# Altium PCB SJA1105Q_LAN8870_EVB_revA.PcbDoc (part 1 of 5)
Units mm, origin at the board's own origin, x right, y up, seen from the top; angles counter-clockwise.
Board outline 128 x 110 mm, 6 copper layers (Top Layer, Mid Layer 1, Mid Layer 2, Mid Layer 3, Mid Layer 4, Bottom Layer), stack 1.538 mm thick; 490 components, 327 nets, 1659 pads, 519 vias.
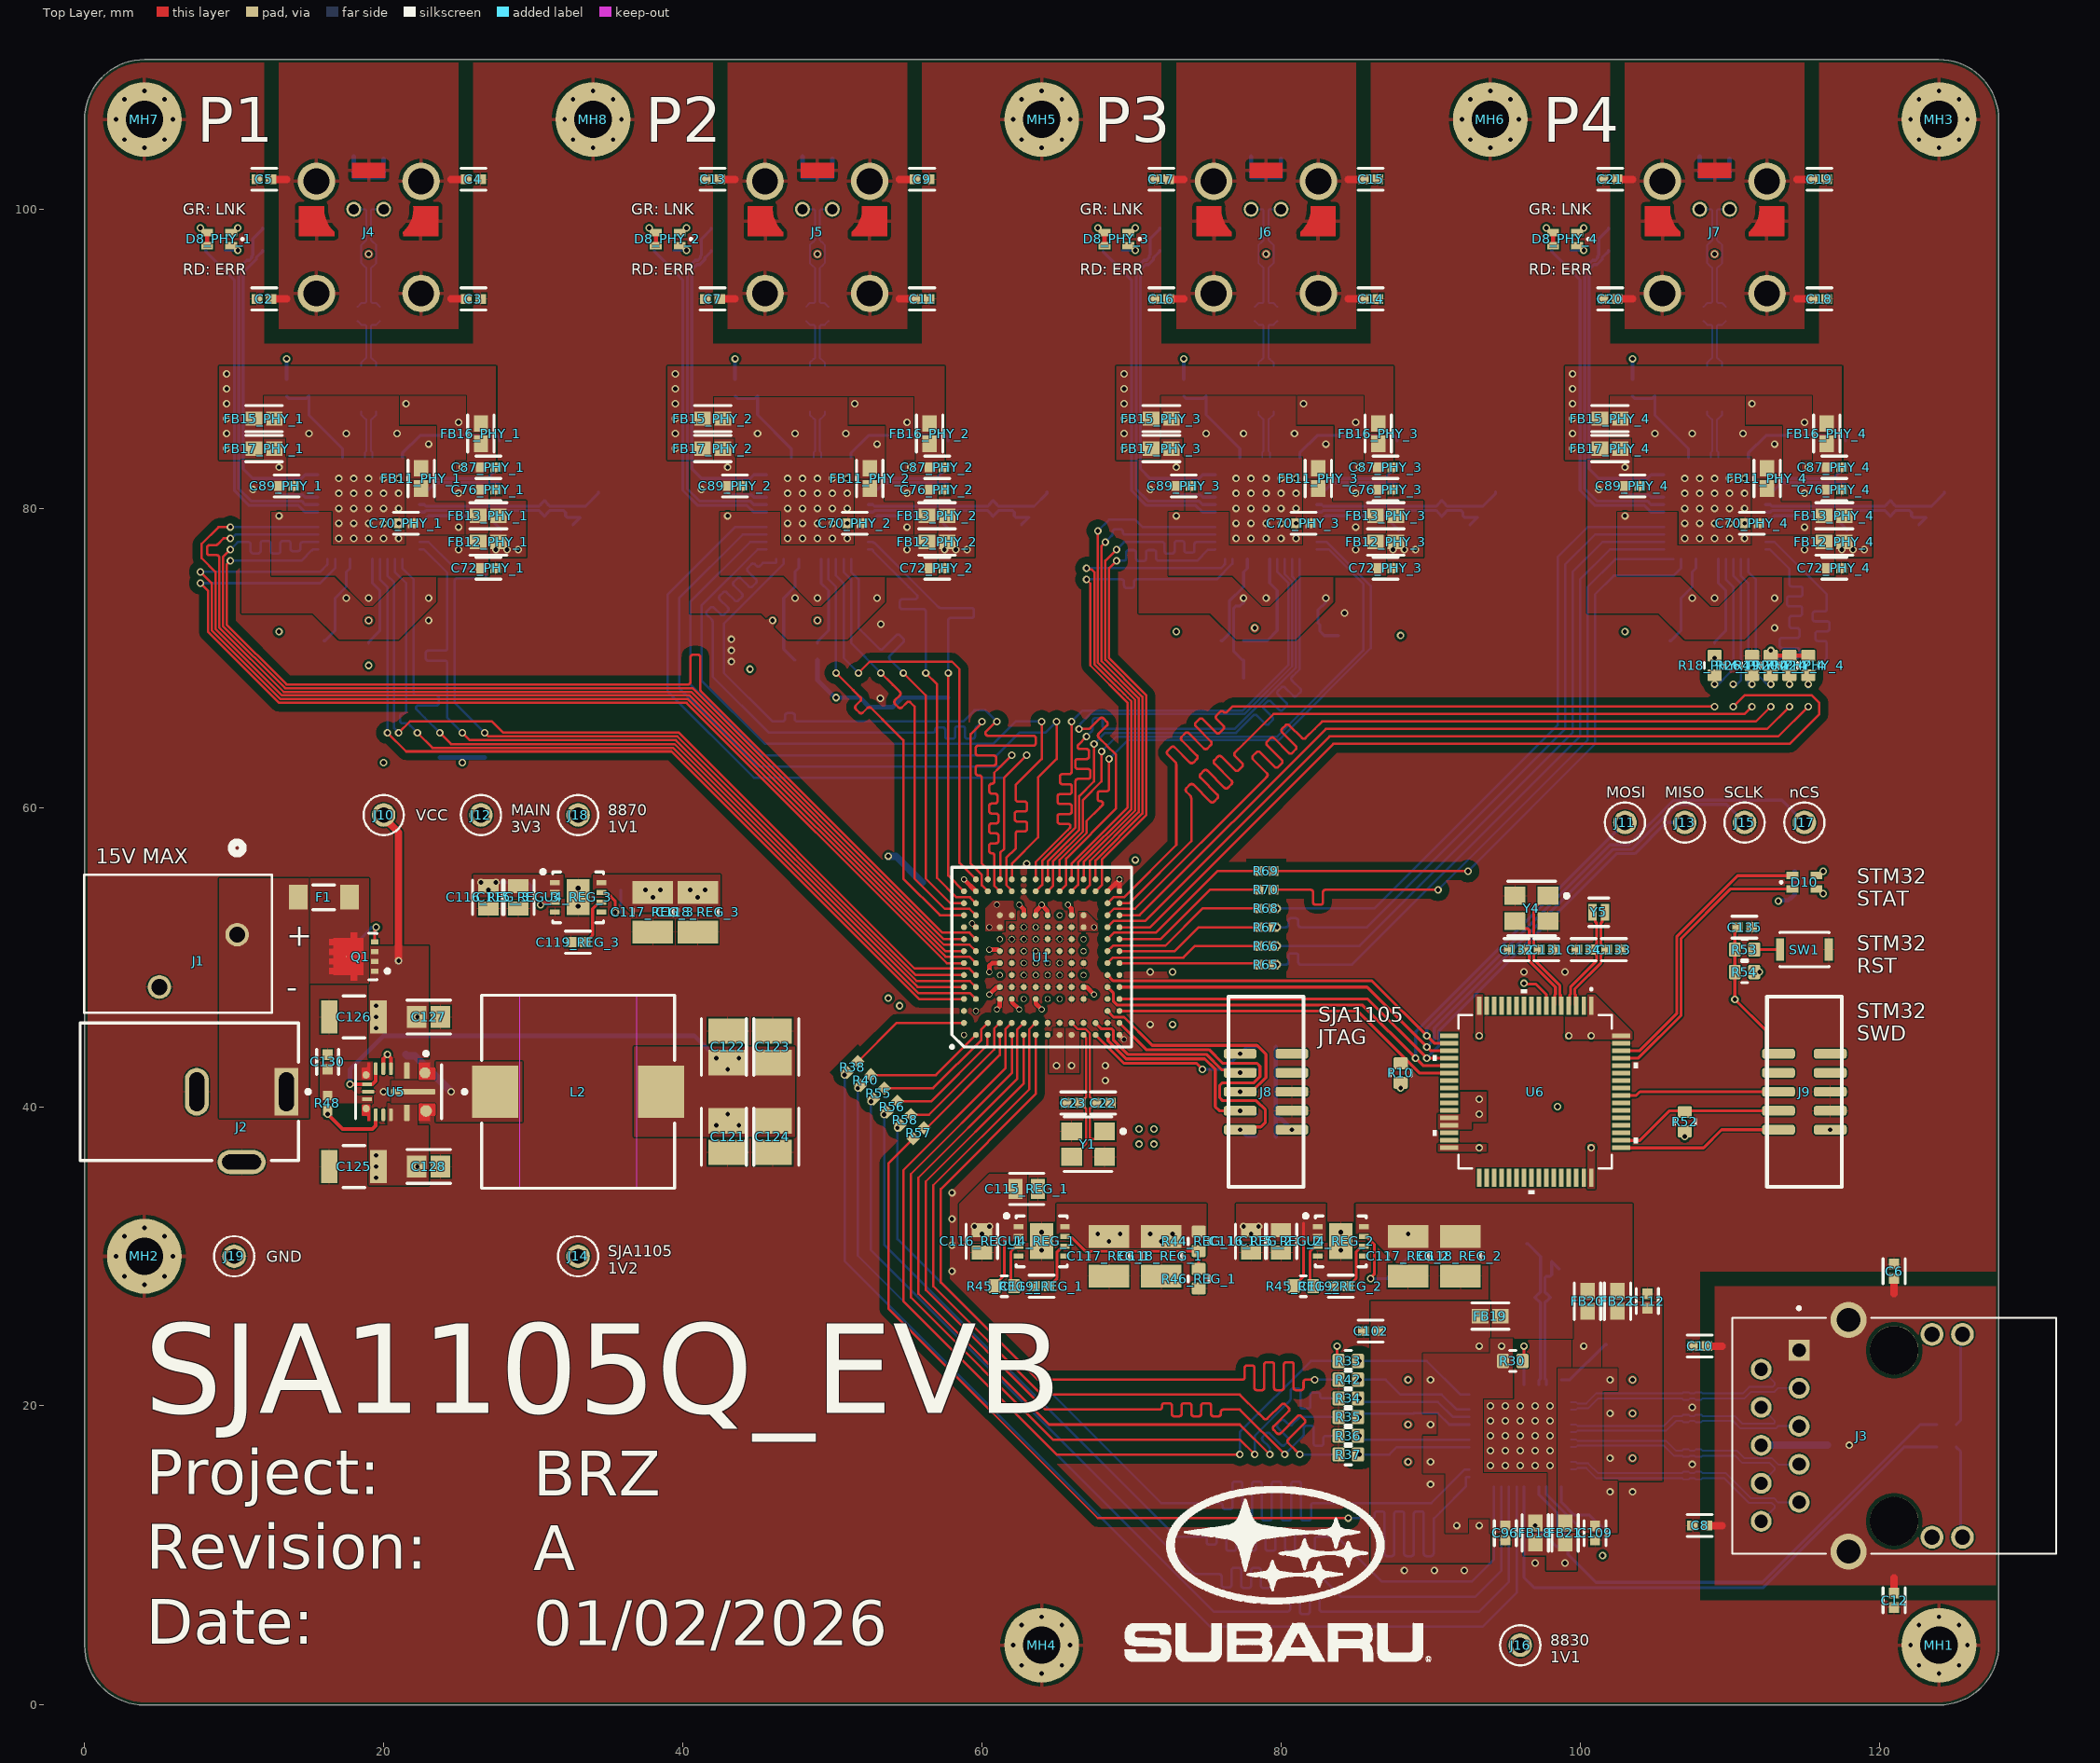
[diagram p0: Top Layer view]
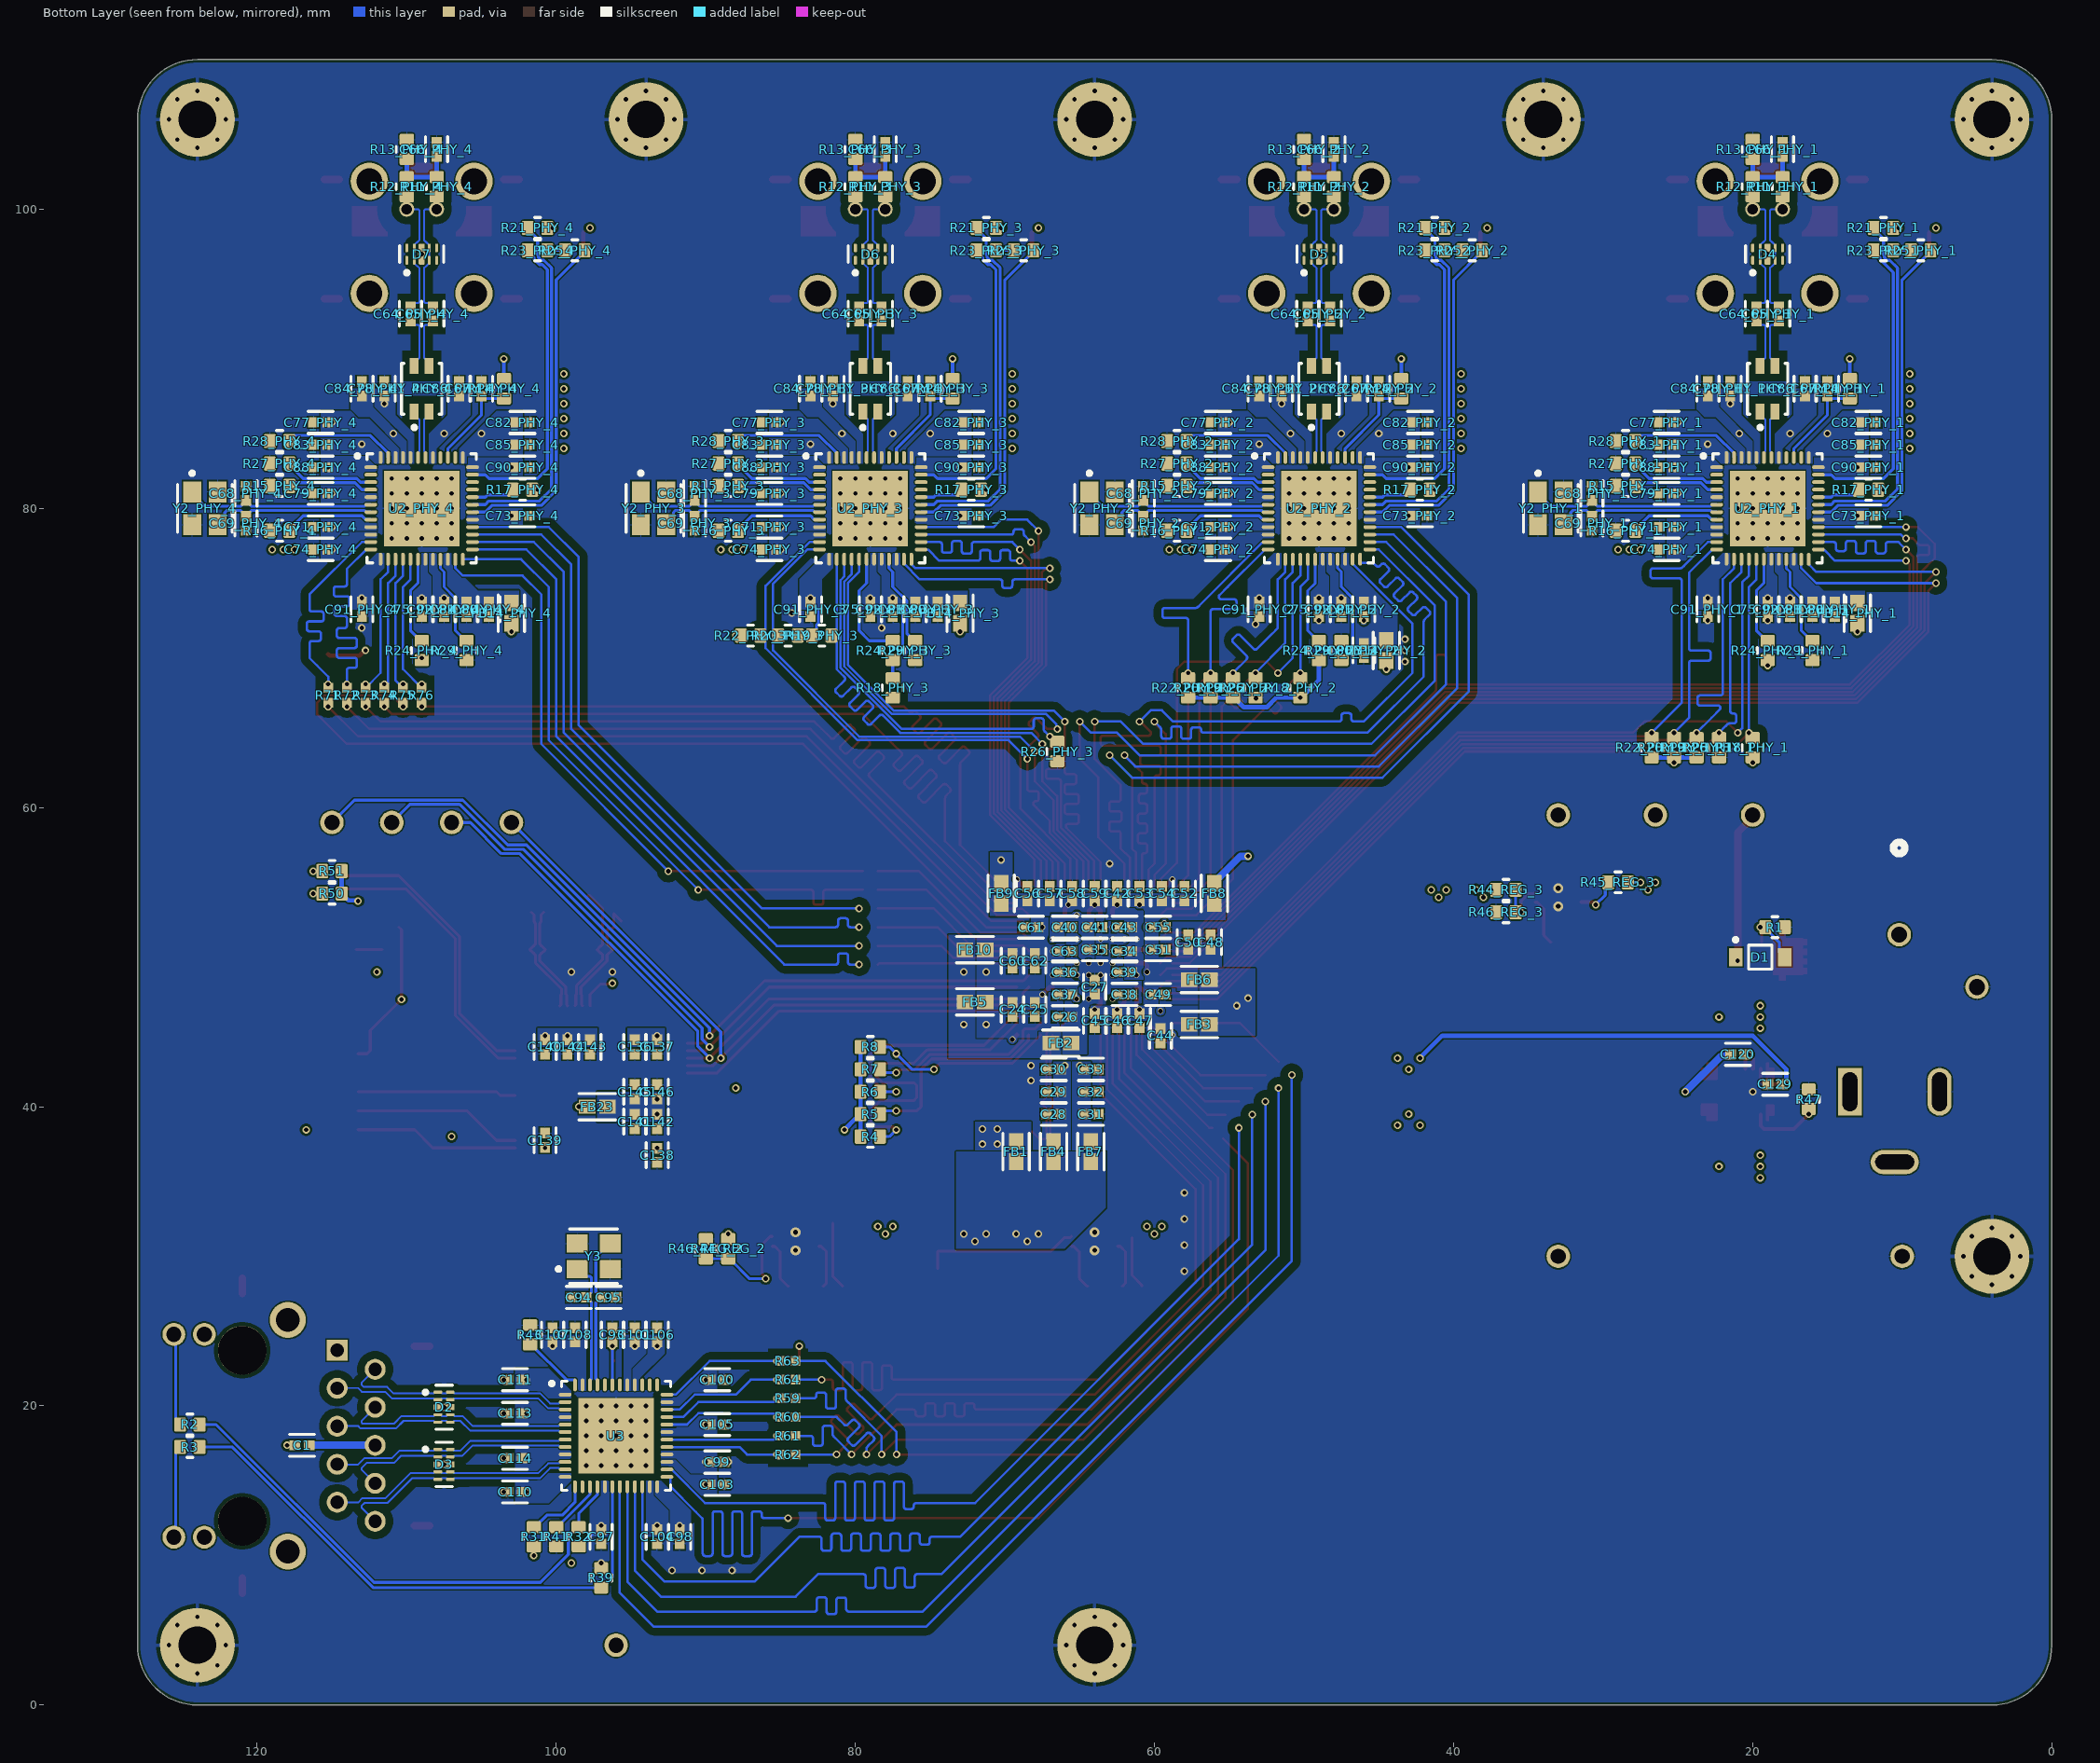
[diagram p1: Bottom Layer view, seen from below]
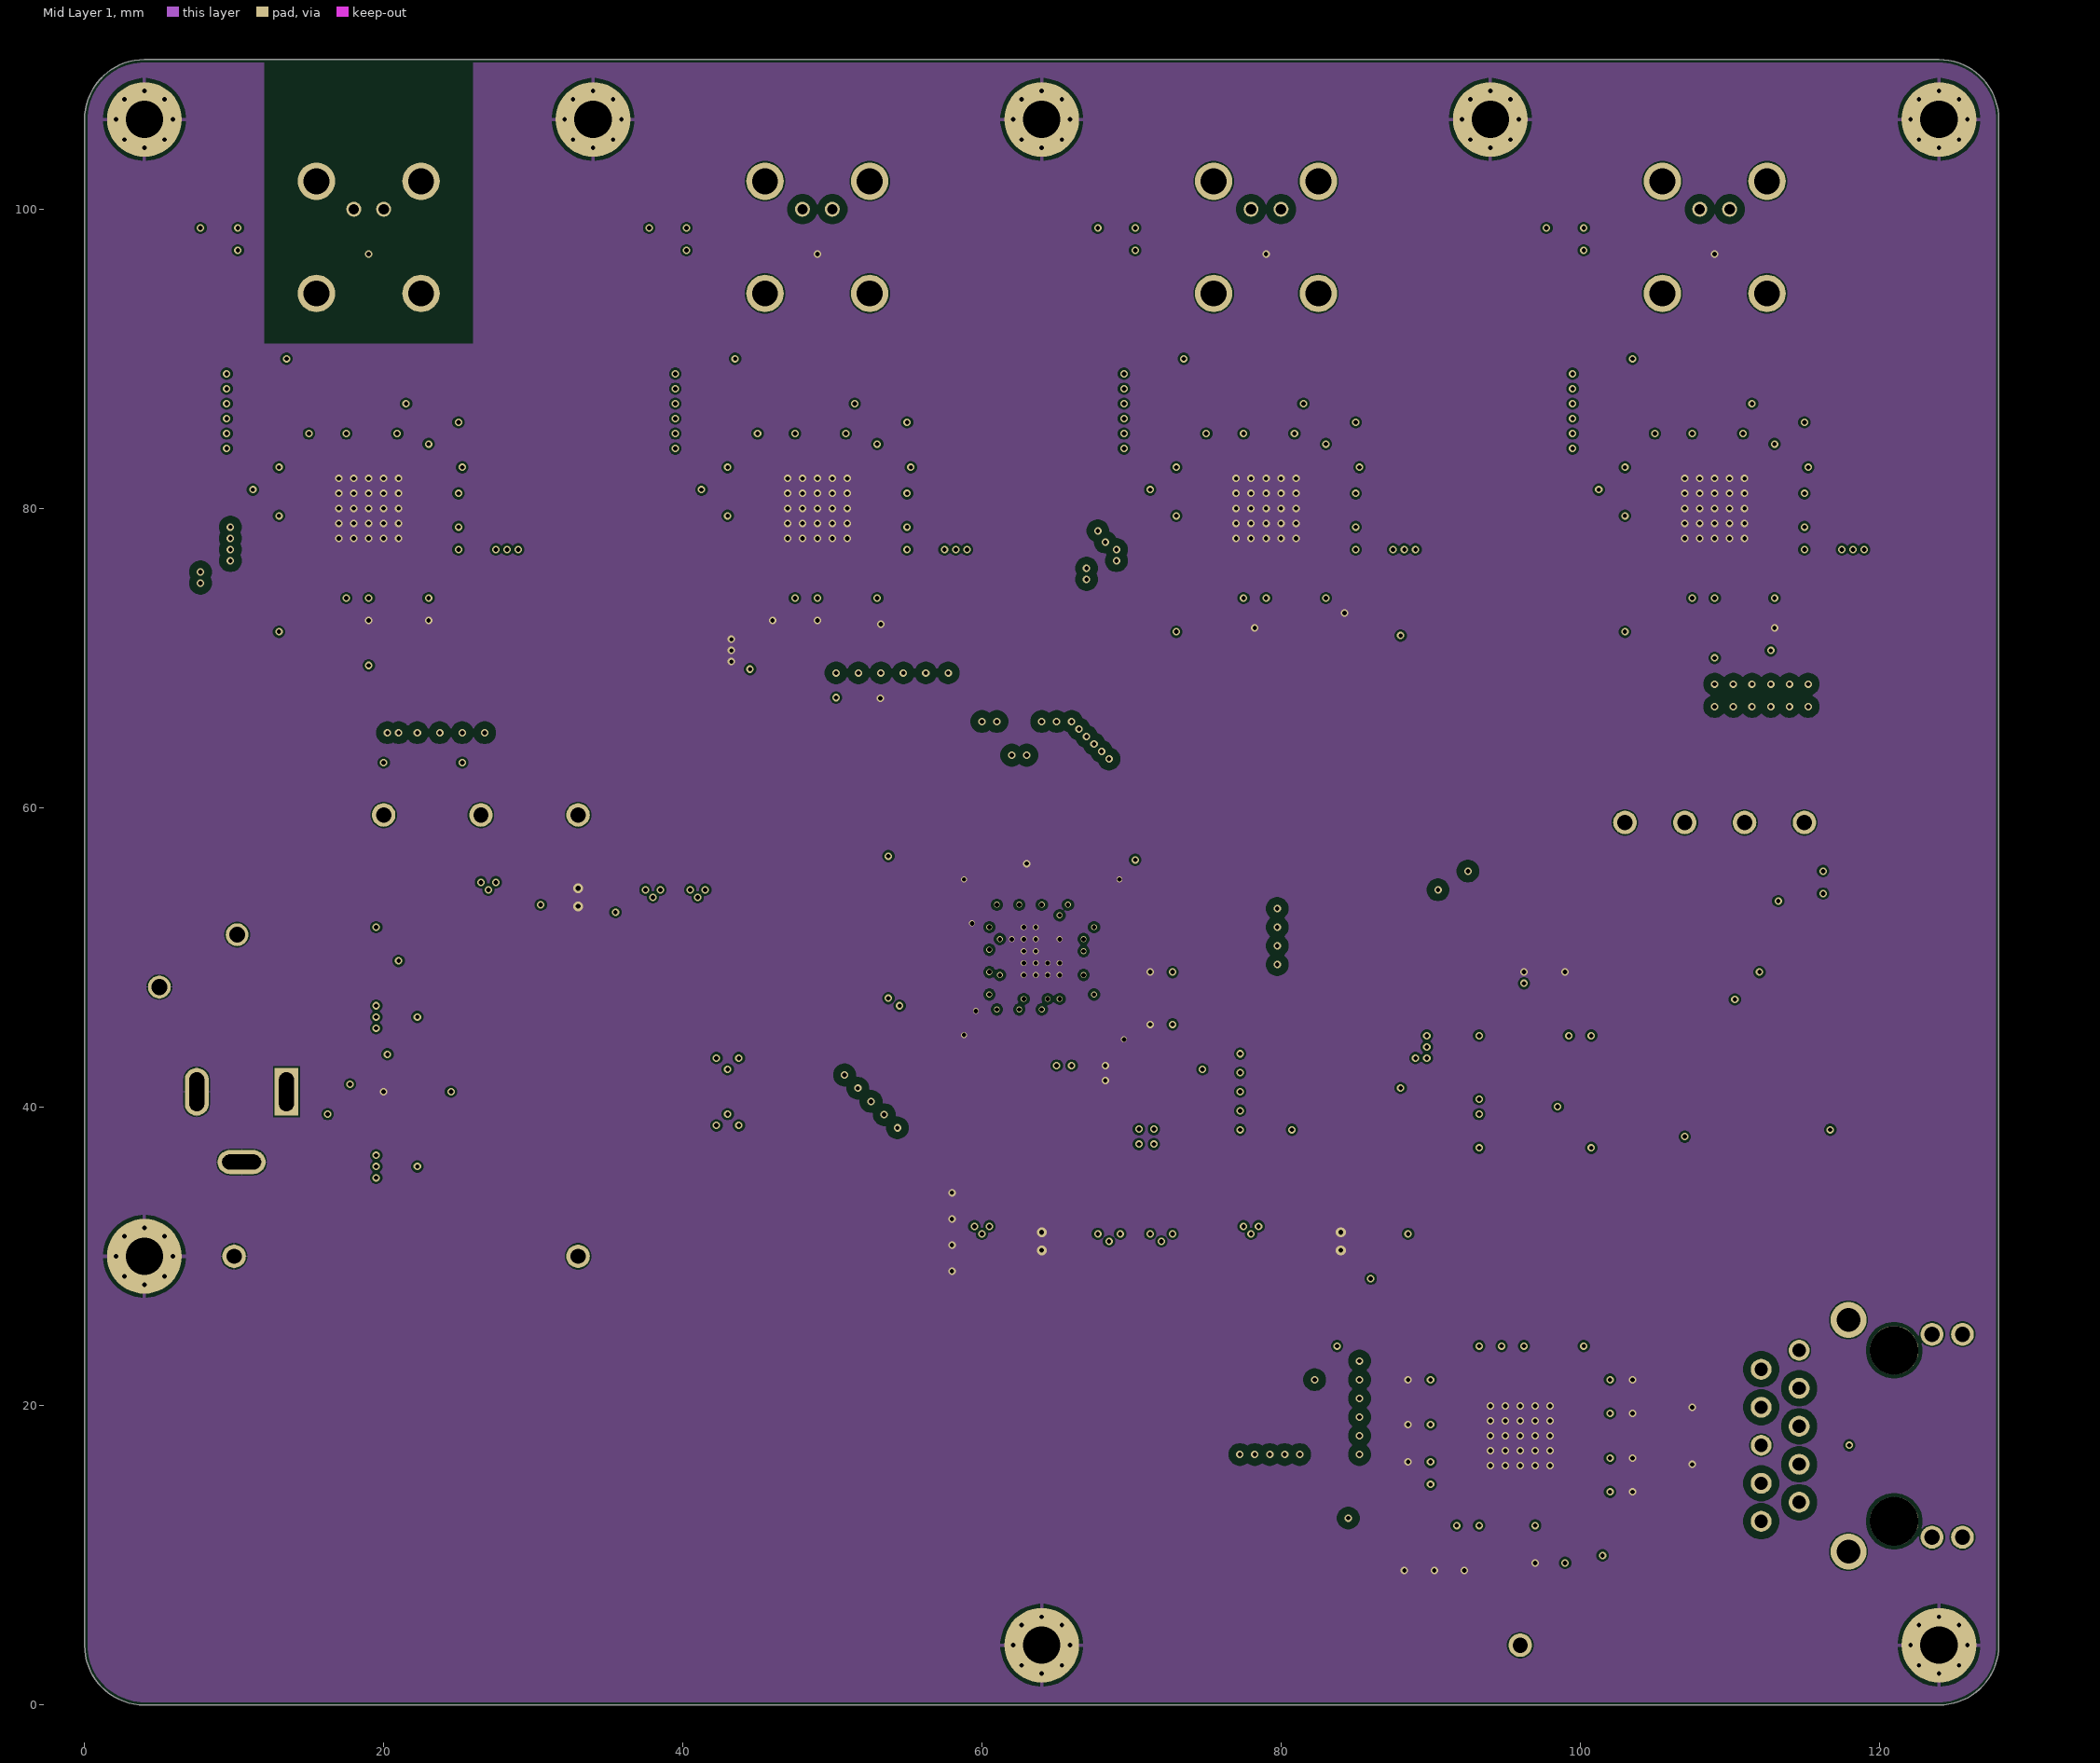
[diagram p2: Mid Layer 1]
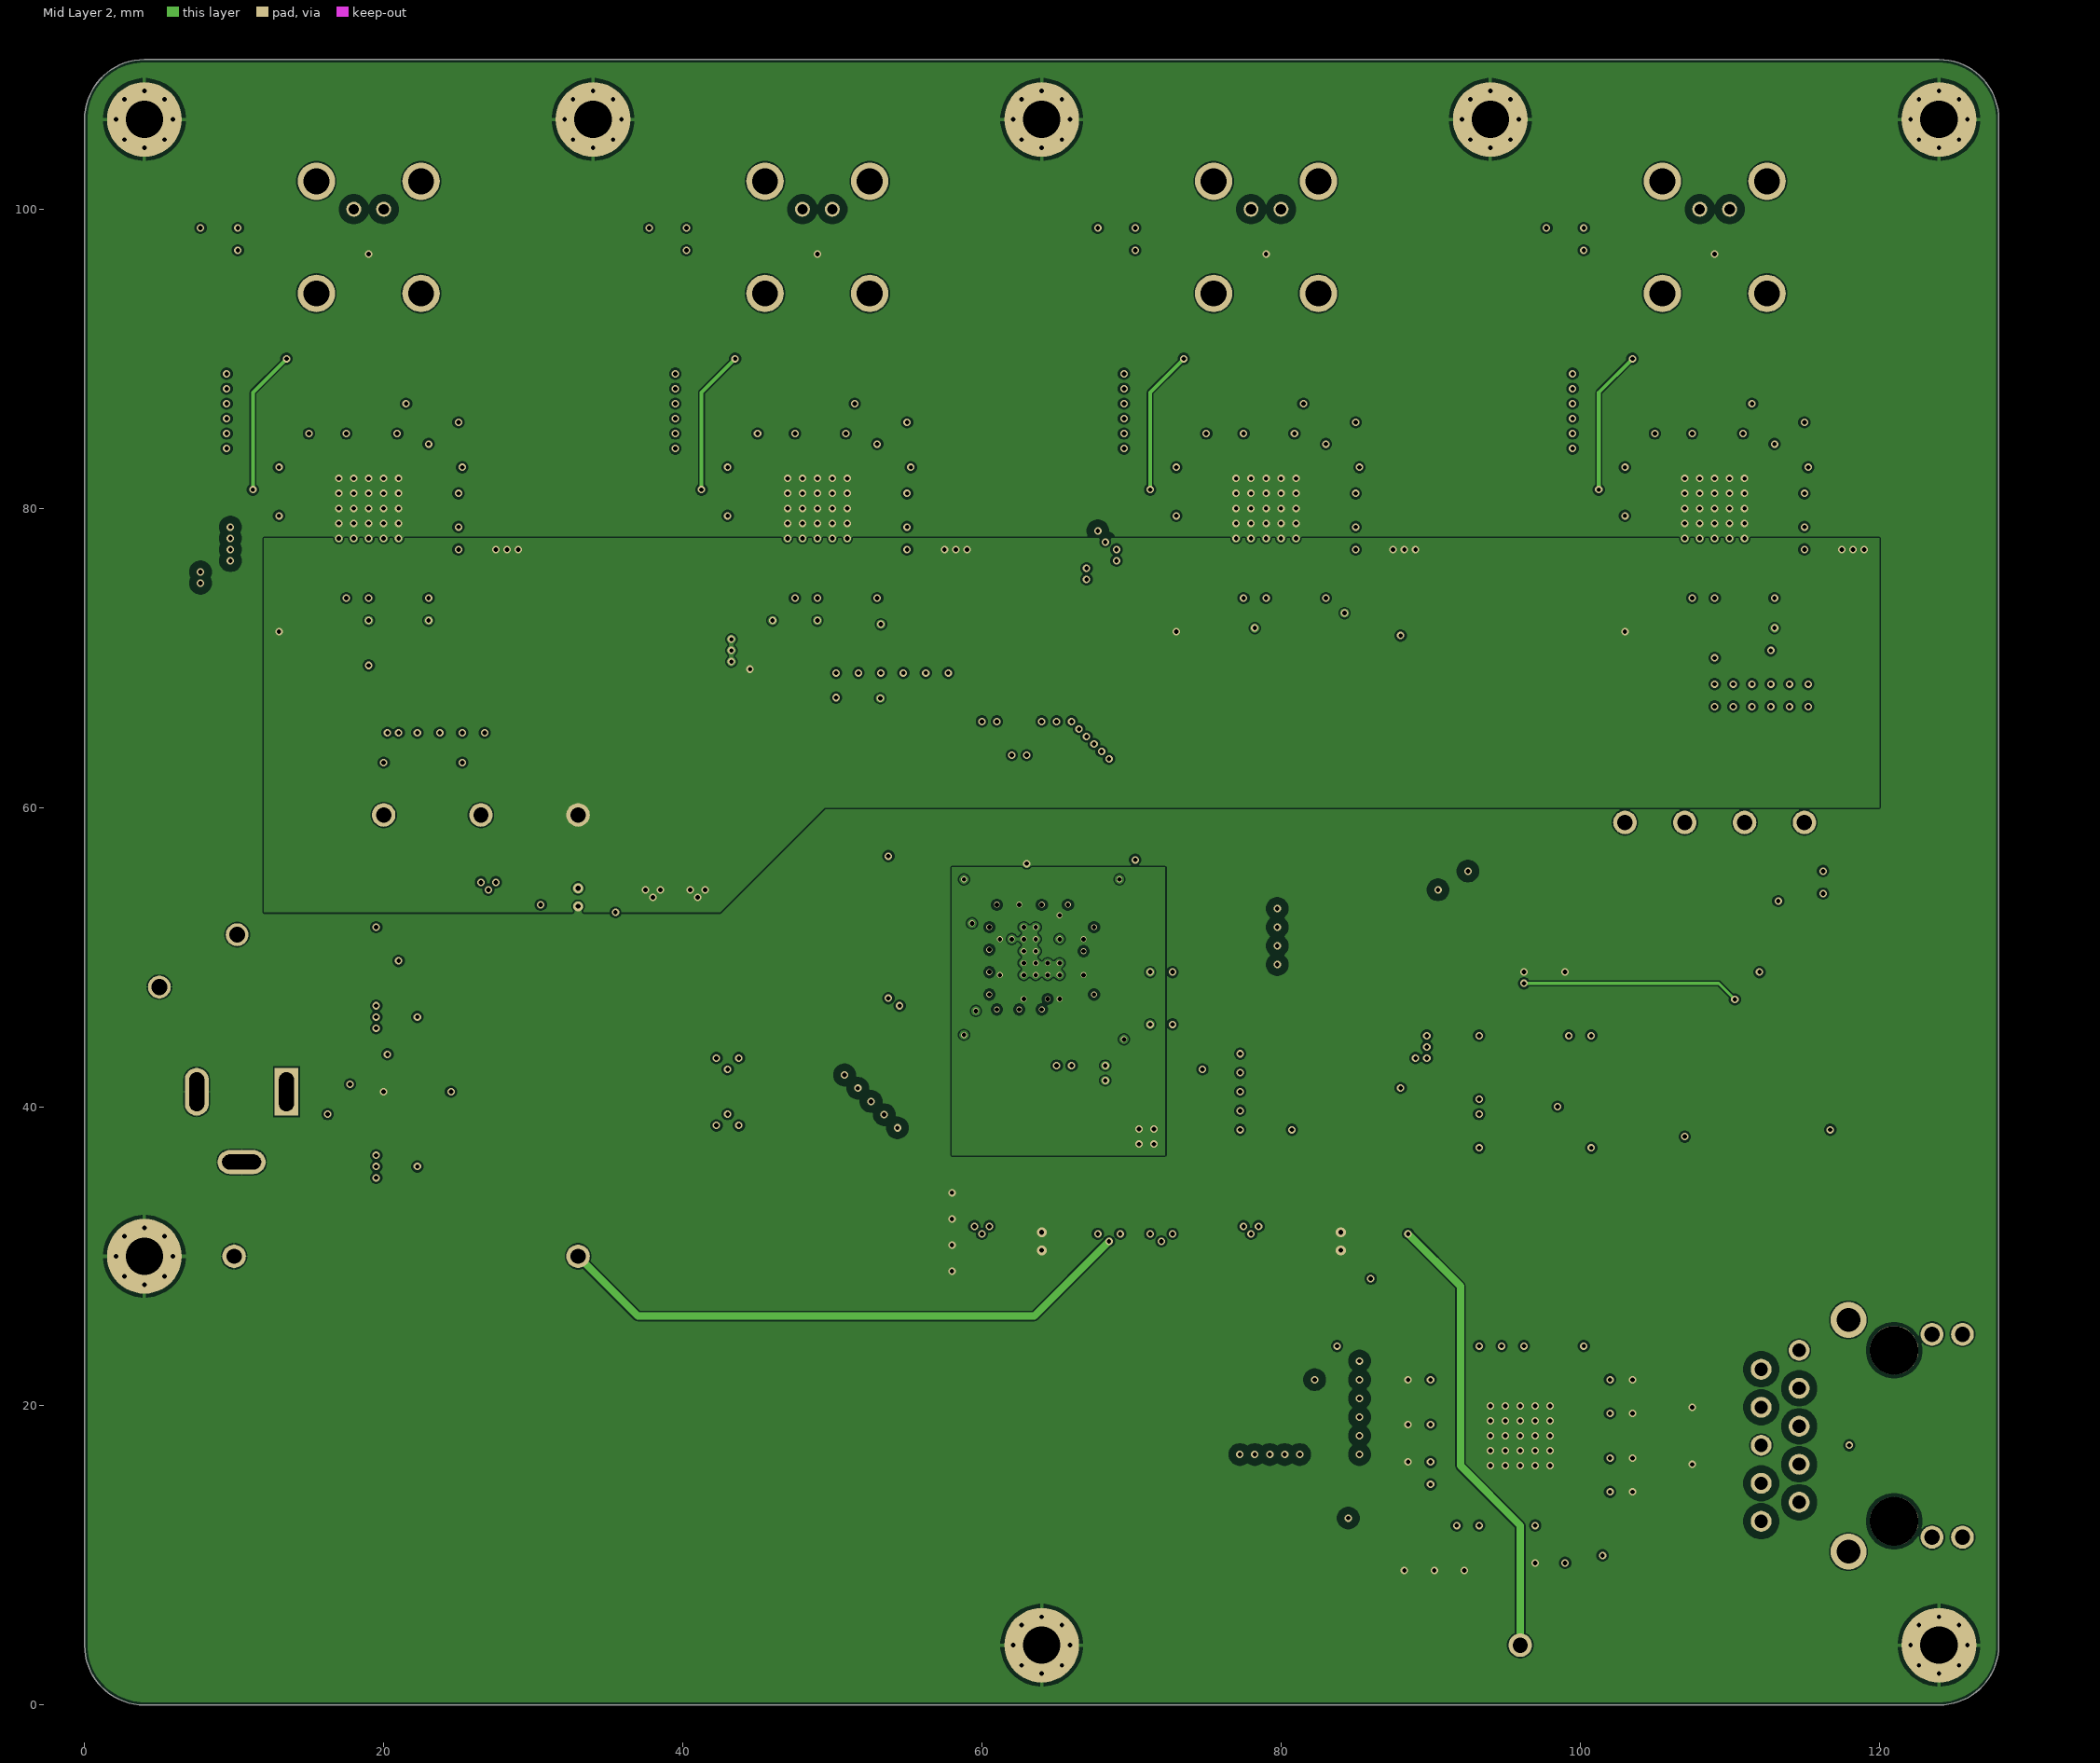
[diagram p3: Mid Layer 2]
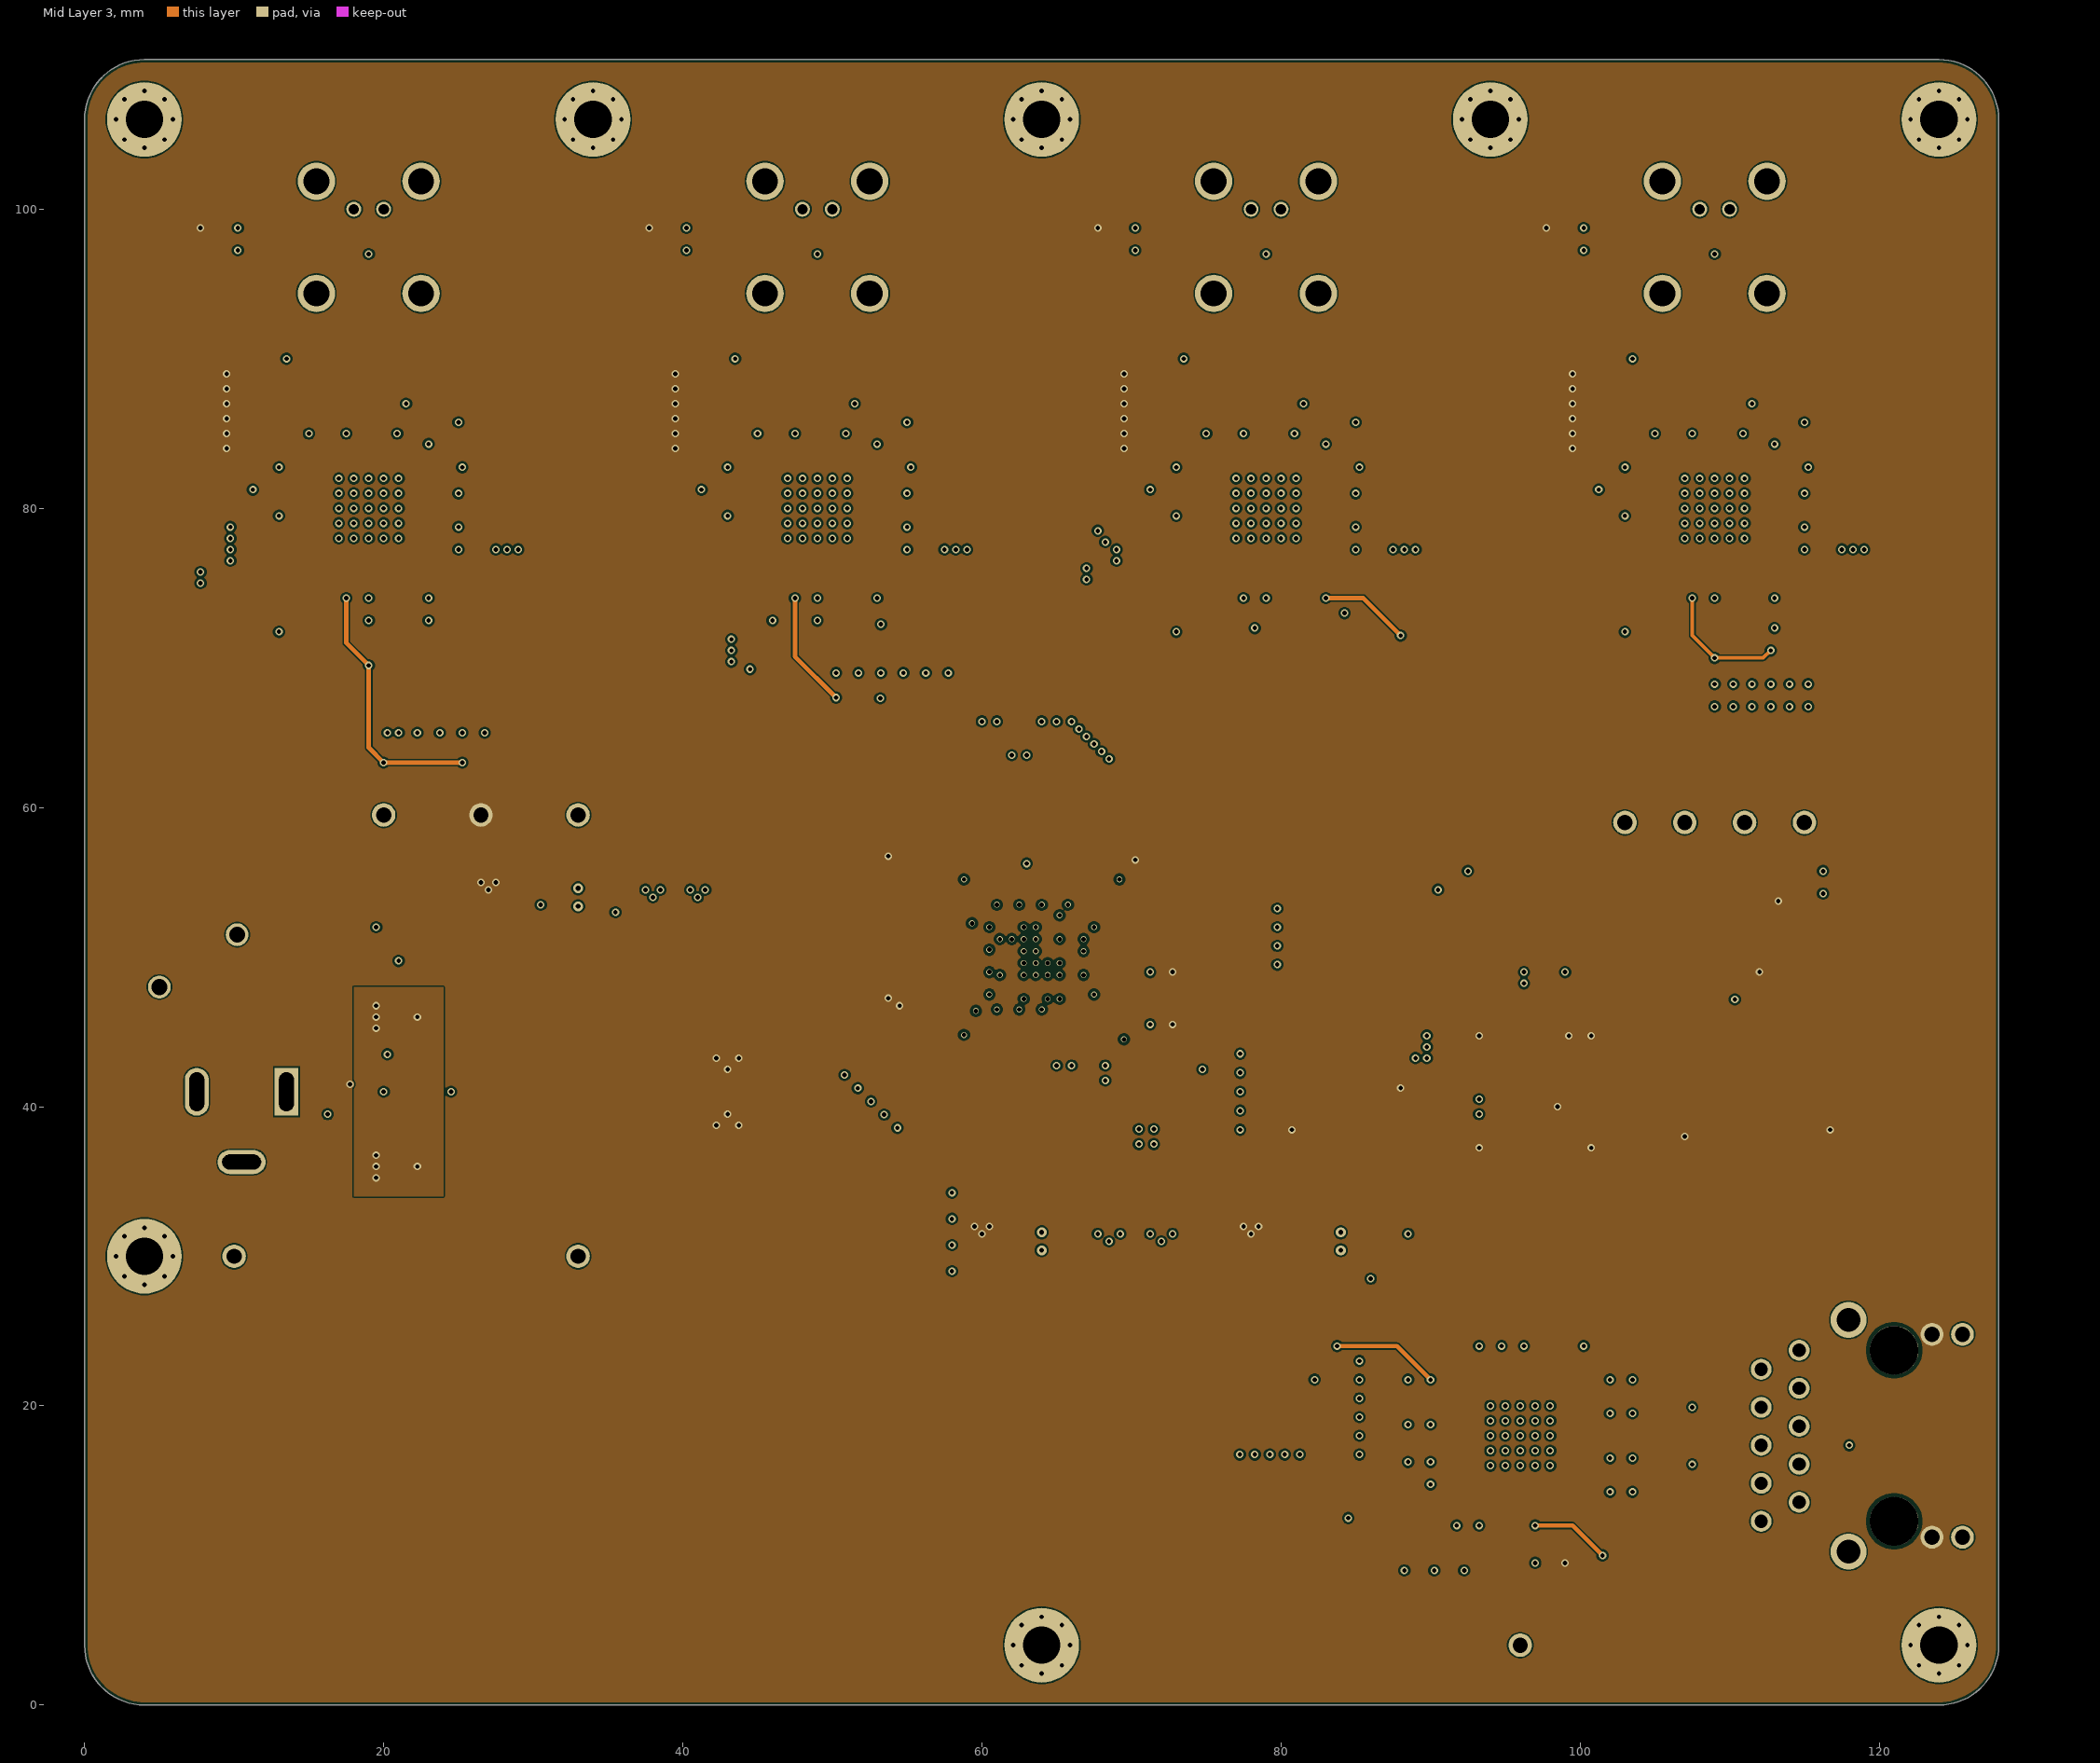
[diagram p4: Mid Layer 3]
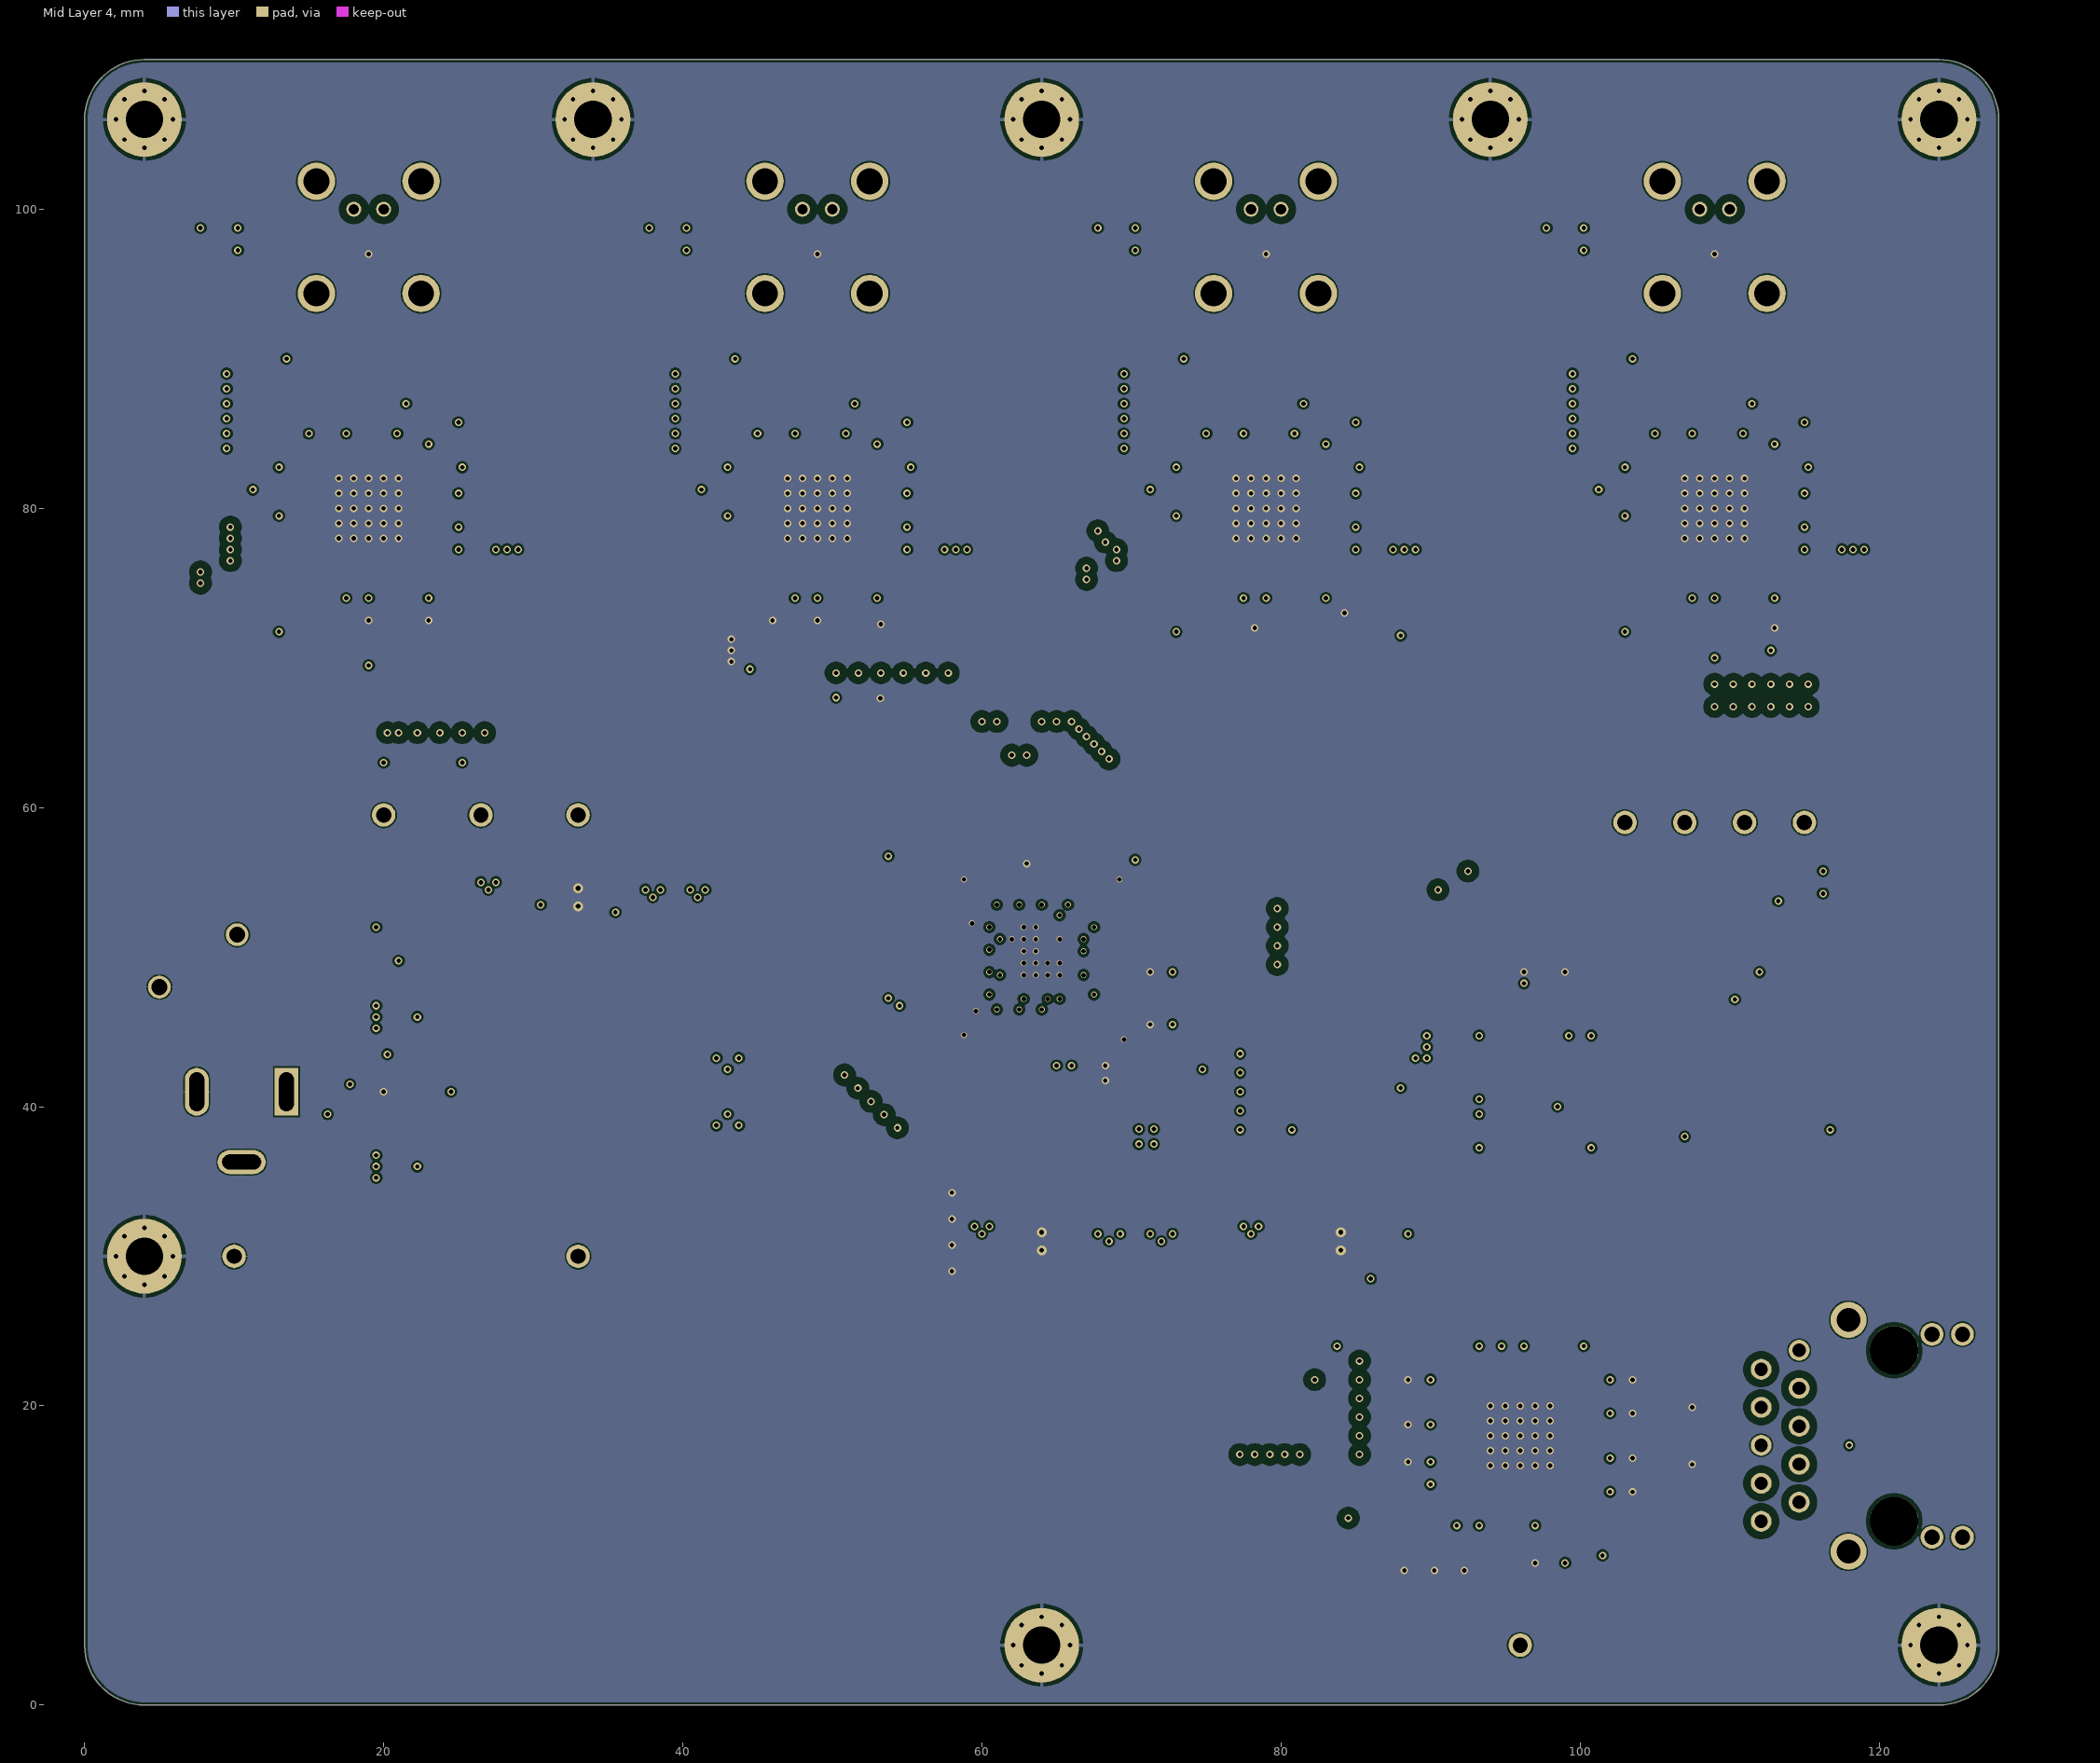
[diagram p5: Mid Layer 4]
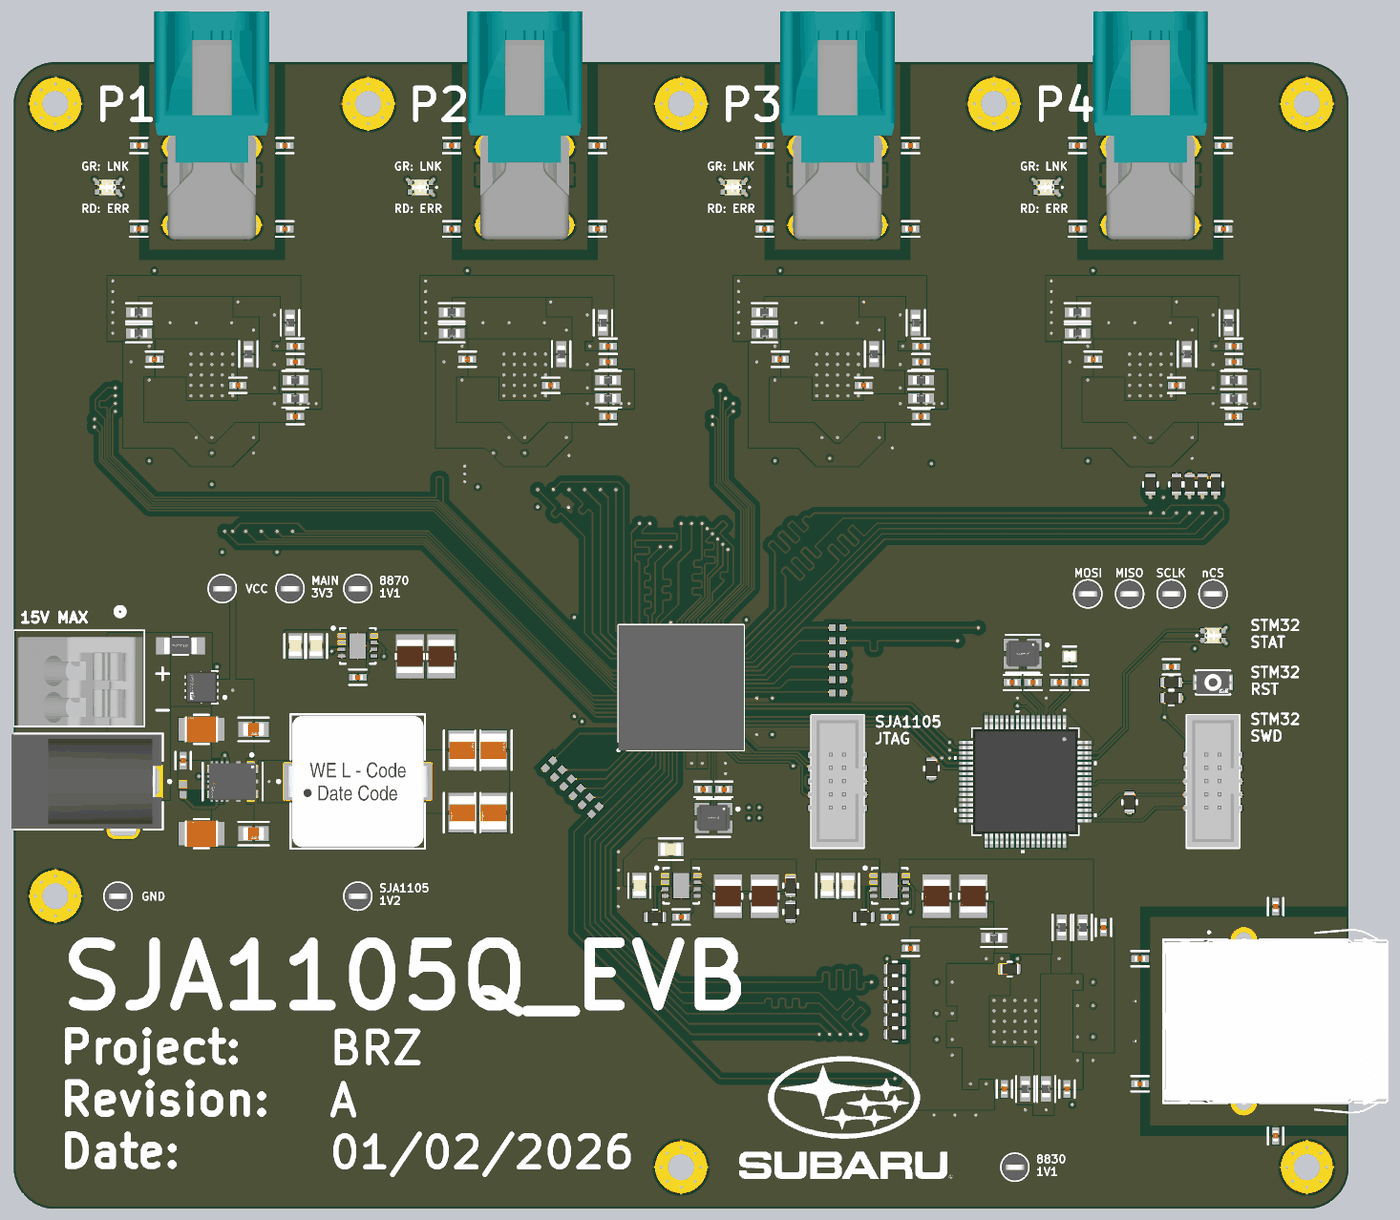
[diagram p10: 3D render of the assembled board from above, using the file's embedded part models]
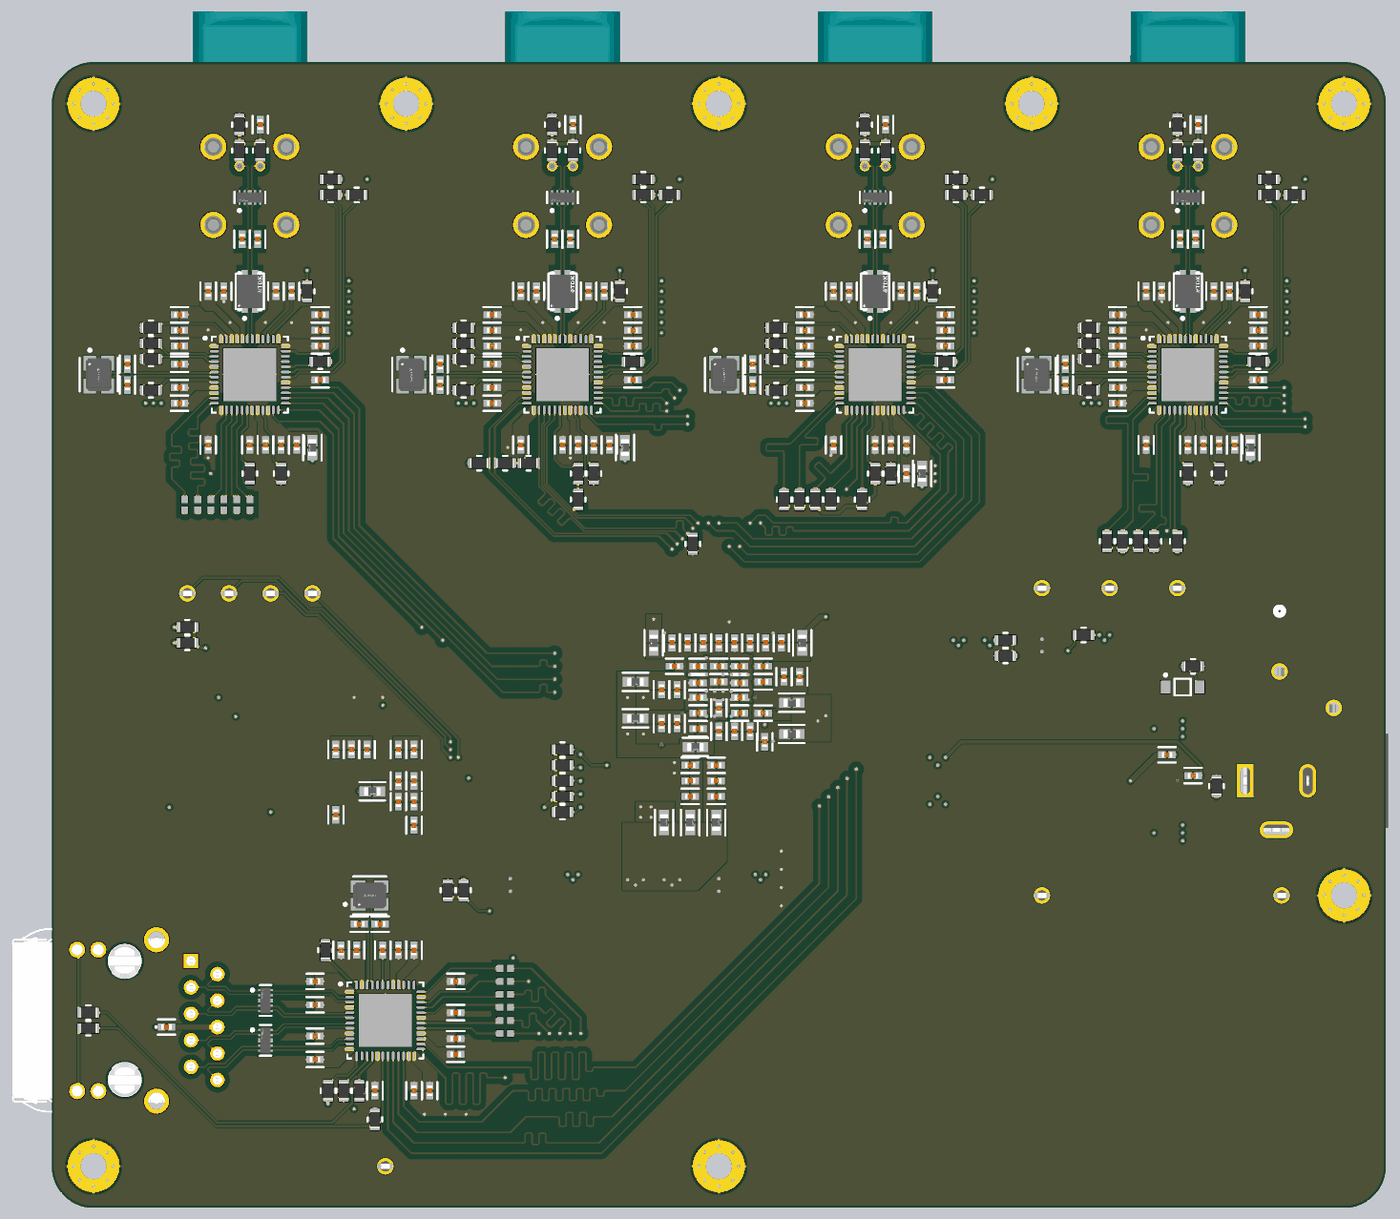
[diagram p11: 3D render of the assembled board from below, using the file's embedded part models]

## Layer stack, top to bottom
Top Solder: solder mask 0.0127, Solder Resist, Dk 3.8
Top Layer: signal copper 0.035
Dielectric 1: prepreg 0.0994, PP-015, Dk 4.3
Mid Layer 1: signal copper 0.0152
Core 1: core 0.55, FR-4, Dk 4.5
Mid Layer 2: signal copper 0.0152
Dielectric 2: prepreg 0.1088, 2116, Dk 4.25
Mid Layer 3: signal copper 0.0152
Core 2: core 0.55, FR-4, Dk 4.5
Mid Layer 4: signal copper 0.0152
Dielectric 3: prepreg 0.0994, PP-015, Dk 4.3
Bottom Layer: signal copper 0.035
Bottom Solder: solder mask 0.0127, Solder Resist, Dk 3.8

## Board outline
0,4 0,106 cw(c4,106) 4,110 124,110 cw(c124,106) 128,106 128,4 cw(c124,4) 124,0 4,0 cw(c4,4)

## Design rules (kind name [scope] priority, off if disabled: settings)
BoardOutlineClearance [All] p1: gap=0.2 ignorepadtopadclearanceinfootprint=FALSE
Clearance IMPEDANCE_CLEARANCE [InDifferentialPairClass('100DIFF') or InNetClass('P0_RXD') or InNetClass('P0_TXD') or InNetClass('P1_RXD') or InNetClass('P1_TXD') or InNetClass('P2_RXD') or InNetClass('P2_TXD') or InNetClass('P3_RXD') or InNetClass('P3_TXD') or InNetClass('P4_RXD') or InNetClass('P4_TXD') vs InNet('GND')] p1: gap=0.5 ignorepadtopadclearanceinfootprint=FALSE except(0.089: Arc-Arc Arc-Track Arc-SMDPad Arc-THPad Arc-Text Track-Track Track-SMDPad Track-THPad Track-Text SMDPad-SMDPad SMDPad-THPad SMDPad-Text THPad-THPad THPad-Text Fill-Text Poly-Text Region-Text Text-Text; 0.127: Arc-Via Track-Via SMDPad-Via THPad-Via Via-Via Via-Text; 0.25: Arc-Hole Track-Hole SMDPad-Hole THPad-Hole Via-Hole Fill-Hole Poly-Hole Region-Hole Text-Hole)
Clearance [All] p2: gap=0.089 ignorepadtopadclearanceinfootprint=FALSE except(0.127: Arc-Via Track-Via SMDPad-Via THPad-Via Via-Via Via-Fill Via-Poly Via-Region Via-Text; 0.25: Arc-Hole Track-Hole SMDPad-Hole THPad-Hole Via-Hole Fill-Hole Poly-Hole Region-Hole Text-Hole)
ComponentClearance [All] p1: gap=0.089 collisioncheckmode=3 verticalgap=0.089 showdistances=TRUE
DiffPairsRouting 100OHM [InDifferentialPairClass('100DIFF')] p1: maxlimit=0.2 minlimit=0.127 mostfreqgap=0.127 toplayer_mingap=0.2 toplayer_prefgap=0.2 toplayer_minwidth=0.123 toplayer_maxwidth=0.123 toplayer_prefwidth=0.123 midlayer1_maxgap=0.127 midlayer1_minwidth=0.074 midlayer1_maxwidth=0.074 midlayer1_prefwidth=0.074 midlayer2_maxgap=0.127 midlayer2_minwidth=0.078 midlayer2_maxwidth=0.078 midlayer2_prefwidth=0.078 midlayer3_maxgap=0.127 midlayer3_minwidth=0.078 midlayer3_maxwidth=0.078 midlayer3_prefwidth=0.078 midlayer4_maxgap=0.127 midlayer4_minwidth=0.074 midlayer4_maxwidth=0.074 midlayer4_prefwidth=0.074 bottomlayer_mingap=0.2 bottomlayer_prefgap=0.2 bottomlayer_minwidth=0.123 bottomlayer_maxwidth=0.123 bottomlayer_prefwidth=0.123 impedanceprofiledriven=TRUE impedanceprofileid={E4492115-1F55-4536-8448-43D4DA211AC8} impedanceprofilevalue=100.000000 maxuncoupledlength=12.7
DiffPairsRouting [All] p2: maxlimit=0.089 minlimit=0.089 mostfreqgap=0.089 toplayer_minwidth=0.089 toplayer_maxwidth=1816.048 toplayer_prefwidth=0.2 midlayer1_minwidth=0.089 midlayer1_maxwidth=1816.048 midlayer1_prefwidth=0.2 midlayer2_minwidth=0.089 midlayer2_maxwidth=1816.048 midlayer2_prefwidth=0.2 midlayer3_minwidth=0.089 midlayer3_maxwidth=1816.048 midlayer3_prefwidth=0.2 midlayer4_minwidth=0.089 midlayer4_maxwidth=1816.048 midlayer4_prefwidth=0.2 bottomlayer_minwidth=0.089 bottomlayer_maxwidth=1816.048 bottomlayer_prefwidth=0.2 maxuncoupledlength=12.7
Height [All] p1: minheight=0 maxheight=1816.048 prefheight=12.7
HoleSize [All] p1: absolutevalues=TRUE maxlimit=6.3 minlimit=0.2 maxpercent=80.000 minpercent=20.000
HoleToHoleClearance [All] p1: gap=0.25 allowstackedmicrovias=FALSE
MatchedLengths MatchLengths_xSignals_U1_U2_PHY_4_3 [InxSignalClass('xSignals_U1_U2_PHY_4_MatchLengthsClass_3')] p1: tolerance=0.5 checknetsindiffpair=FALSE checkdiffpairvsdiffpair=TRUE checkxsignals=TRUE checkothers=TRUE
MatchedLengths MatchLengths_xSignals_U1_U2_PHY_4_2 [InxSignalClass('xSignals_U1_U2_PHY_4_MatchLengthsClass_2')] p2: tolerance=0.5 checknetsindiffpair=FALSE checkdiffpairvsdiffpair=TRUE checkxsignals=TRUE checkothers=TRUE
MatchedLengths MatchLengths_xSignals_U1_U2_PHY_4_1 [InxSignalClass('xSignals_U1_U2_PHY_4_MatchLengthsClass_1')] p3: tolerance=0.5 checknetsindiffpair=FALSE checkdiffpairvsdiffpair=TRUE checkxsignals=TRUE checkothers=TRUE
MatchedLengths MatchLengths_xSignals_U1_U2_PHY_4 [InxSignalClass('xSignals_U1_U2_PHY_4_MatchLengthsClass')] p4: tolerance=0.5 checknetsindiffpair=FALSE checkdiffpairvsdiffpair=TRUE checkxsignals=TRUE checkothers=TRUE
MatchedLengths P3_RXD [InNetClass('P3_RXD')] p5: tolerance=0.5 checknetsindiffpair=FALSE checkdiffpairvsdiffpair=TRUE checkxsignals=TRUE checkothers=TRUE
MatchedLengths P3_TXD [InNetClass('P3_TXD')] p6: tolerance=0.5 checknetsindiffpair=FALSE checkdiffpairvsdiffpair=TRUE checkxsignals=TRUE checkothers=TRUE
MatchedLengths P2_RXD [InNetClass('P2_RXD')] p7: tolerance=0.5 checknetsindiffpair=FALSE checkdiffpairvsdiffpair=TRUE checkxsignals=TRUE checkothers=TRUE
MatchedLengths P2_TXD [InNetClass('P2_TXD')] p8: tolerance=0.5 checknetsindiffpair=FALSE checkdiffpairvsdiffpair=TRUE checkxsignals=TRUE checkothers=TRUE
MatchedLengths P1_RXD [InNetClass('P1_RXD')] p9: tolerance=0.5 checknetsindiffpair=FALSE checkdiffpairvsdiffpair=TRUE checkxsignals=TRUE checkothers=TRUE
MatchedLengths P1_TXD [InNetClass('P1_TXD')] p10: tolerance=0.5 checknetsindiffpair=FALSE checkdiffpairvsdiffpair=TRUE checkxsignals=TRUE checkothers=TRUE
MinimumAnnularRing [All] p1: minimumring=0.076
MinimumSolderMaskSliver [All] p1: minsoldermaskwidth=0
PlaneClearance [All] p1: clearance=0.089
PlaneConnect PlaneConnectPowerPads [InPadClass('PowerPads')] p1: planeconnectstyle=Direct reliefexpansion=0.508 reliefentries=4 reliefconductorwidth=0.254 reliefairgap=0.254
PlaneConnect [All] p2: pad.planeconnectstyle=Relief pad.reliefexpansion=0.3 pad.reliefentries=4 pad.reliefconductorwidth=0.089 pad.reliefairgap=0.089 via.planeconnectstyle=Direct via.reliefexpansion=0.3 via.reliefentries=4 via.reliefconductorwidth=0.127 via.reliefairgap=0.127
PolygonConnect PolygonConnectPowerPads [All vs InNetClass('PWR')] p1: connectstyle=Direct reliefconductorwidth=0.254 reliefentries=4 polygonreliefangle="90 Angle" airgapwidth=0.254
PolygonConnect [All] p2: thpad.connectstyle=Relief thpad.reliefconductorwidth=0.089 thpad.reliefentries=4 thpad.polygonreliefangle="90 Angle" thpad.airgapwidth=0.089 smdpad.connectstyle=Relief smdpad.reliefconductorwidth=0.089 smdpad.reliefentries=4 smdpad.polygonreliefangle="90 Angle" smdpad.airgapwidth=0.089 via.connectstyle=Direct via.reliefconductorwidth=0.127 via.reliefentries=4 via.polygonreliefangle="90 Angle" via.airgapwidth=0.127
RoomDefinition PHY_0 [InComponentClass('PHY_0')] p1: confinementstyle=ConfineIn formatcopy=TRUE lockcomponents=FALSE outline 132,7 132,38 82,38 82,7
RoomDefinition PHY_4 [InComponentClass('PHY_4')] p2: confinementstyle=ConfineIn formatcopy=TRUE lockcomponents=FALSE outline 97,68 126,68 126,116 97,116
RoomDefinition PHY_3 [InComponentClass('PHY_3')] p3: confinementstyle=ConfineIn formatcopy=TRUE lockcomponents=FALSE outline 67,68 96,68 96,116 67,116
RoomDefinition PHY_2 [InComponentClass('PHY_2')] p4: confinementstyle=ConfineIn formatcopy=TRUE lockcomponents=FALSE outline 37,68 66,68 66,116 37,116
RoomDefinition PHY_1 [InComponentClass('PHY_1')] p5: confinementstyle=ConfineIn formatcopy=TRUE lockcomponents=FALSE outline 7,68 36,68 36,116 7,116
RoutingVias [All] p1: holewidth=0.2 width=0.45 viastyle="Through Hole" minholewidth=0.2 minwidth=0.45 maxholewidth=6.3 maxwidth=6.55
SilkToSilkClearance [All] p1: silktosilkclearance=0
SilkToSolderMaskClearance [IsPad] p1: minsilkscreentomaskgap=0.089 clearancetoexposedcopper=TRUE
SolderMaskExpansion [All] p1: expansion=0.075 istentingtop=FALSE
SupplyNets "Schematic Supply Nets_23" [InNet('8830_1V1')] p1: voltage=0.000
SupplyNets "Schematic Supply Nets_22" [InNet('8870_1V1')] p2: voltage=0.000
SupplyNets "Schematic Supply Nets_21" [InNet('SW_VDDIO_MII2')] p3: voltage=0.000
SupplyNets "Schematic Supply Nets_20" [InNet('SW_VDDIO_MII0')] p4: voltage=0.000
SupplyNets "Schematic Supply Nets_19" [InNet('SW_VDD_CORE')] p5: voltage=0.000
SupplyNets "Schematic Supply Nets_18" [InNet('VCC')] p6: voltage=0.000
SupplyNets "Schematic Supply Nets_17" [InNet('3V3')] p7: voltage=0.000
SupplyNets "Schematic Supply Nets_16" [InNet('SW_VDDA_PLL')] p8: voltage=0.000
SupplyNets "Schematic Supply Nets_15" [InNet('SW_VDDA_OSC')] p9: voltage=0.000
SupplyNets "Schematic Supply Nets_14" [InNet('SW_VDDIO_CLO')] p10: voltage=0.000
SupplyNets "Schematic Supply Nets_13" [InNet('SW_VDDIO_MII3')] p11: voltage=0.000
SupplyNets "Schematic Supply Nets_11" [InNet('SW_VDDIO_MII4')] p12: voltage=0.000
SupplyNets "Schematic Supply Nets_10" [InNet('GND')] p13: voltage=0.000
SupplyNets "Schematic Supply Nets_9" [InNet('P2_GND')] p14: voltage=0.000
SupplyNets "Schematic Supply Nets_8" [InNet('P4_GND')] p15: voltage=0.000
SupplyNets "Schematic Supply Nets_7" [InNet('SW_VDDIO_MII1')] p16: voltage=0.000
SupplyNets "Schematic Supply Nets_6" [InNet('P1_GND')] p17: voltage=0.000
SupplyNets "Schematic Supply Nets_5" [InNet('RJ45_GND')] p18: voltage=0.000
SupplyNets "Schematic Supply Nets_3" [InNet('VDDIO_8830')] p19: voltage=0.000
SupplyNets "Schematic Supply Nets_2" [InNet('SW_VDDIO_HOST')] p20: voltage=0.000
SupplyNets "Schematic Supply Nets_1" [InNet('P3_GND')] p21: voltage=0.000
SupplyNets "Schematic Supply Nets" [InNet('1V2')] p22: voltage=0.000
Width 50OHM [InNetClass('P0_RXD') OR InNetClass('P0_TXD') OR InNetClass('P1_RXD') OR InNetClass('P1_TXD') OR  InNetClass('P2_RXD') OR InNetClass('P2_TXD') OR  InNetClass('P3_RXD') OR InNetClass('P3_TXD') OR  InNetClass('P4_RXD') OR InNetClass('P4_TXD')] p1: maxlimit=0.156 minlimit=0.108 preferedwidth=0.117 toplayer_minwidth=0.156 toplayer_prefwidth=0.156 midlayer1_maxwidth=0.108 midlayer1_prefwidth=0.108 midlayer2_minwidth=0.117 midlayer2_maxwidth=0.117 midlayer3_minwidth=0.117 midlayer3_maxwidth=0.117 midlayer4_maxwidth=0.108 midlayer4_prefwidth=0.108 bottomlayer_minwidth=0.156 bottomlayer_prefwidth=0.156 impedanceprofiledriven=TRUE impedanceprofileid={211BD556-81F6-478E-A0C2-7961B71A180C} impedanceprofilevalue=50.000000 minimp=50.000000 maximp=50.000000 favimp=50.000000
Width [All] p2: maxlimit=1816.048 minlimit=0.089 preferedwidth=0.089
20 further rules are at their usual default settings.

## Classes and differential pairs
component class REG_3: C115_REG_3 C116_REG_3 C117_REG_3 C118_REG_3 C119_REG_3 R44_REG_3 R45_REG_3 R46_REG_3 U4_REG_3
net class P4_TXD: LAN8870_TX_CLK_PHY_4 LAN8870_TX_CTL_PHY_4 LAN8870_TXD0_PHY_4 LAN8870_TXD1_PHY_4 LAN8870_TXD2_PHY_4 LAN8870_TXD3_PHY_4 NetR65_1 NetR66_1 NetR67_1 NetR68_1 NetR69_1 NetR70_1
net class P4_RXD: LAN8870_RX_CLK_PHY_4 LAN8870_RXCTL_PHY_4 LAN8870_RXD0_PHY_4 LAN8870_RXD1_PHY_4 LAN8870_RXD2_PHY_4 LAN8870_RXD3_PHY_4 NetR71_1 NetR72_1 NetR73_1 NetR74_1 NetR75_1 NetR76_1
net class P3_TXD: LAN8870_TX_CLK_PHY_3 LAN8870_TX_CTL_PHY_3 LAN8870_TXD0_PHY_3 LAN8870_TXD1_PHY_3 LAN8870_TXD2_PHY_3 LAN8870_TXD3_PHY_3
net class P3_RXD: LAN8870_RX_CLK_PHY_3 LAN8870_RXCTL_PHY_3 LAN8870_RXD0_PHY_3 LAN8870_RXD1_PHY_3 LAN8870_RXD2_PHY_3 LAN8870_RXD3_PHY_3
net class P2_TXD: LAN8870_TX_CLK_PHY_2 LAN8870_TX_CTL_PHY_2 LAN8870_TXD0_PHY_2 LAN8870_TXD1_PHY_2 LAN8870_TXD2_PHY_2 LAN8870_TXD3_PHY_2
net class P2_RXD: LAN8870_RX_CLK_PHY_2 LAN8870_RXCTL_PHY_2 LAN8870_RXD0_PHY_2 LAN8870_RXD1_PHY_2 LAN8870_RXD2_PHY_2 LAN8870_RXD3_PHY_2
net class P1_TXD: LAN8870_TX_CLK_PHY_1 LAN8870_TX_CTL_PHY_1 LAN8870_TXD0_PHY_1 LAN8870_TXD1_PHY_1 LAN8870_TXD2_PHY_1 LAN8870_TXD3_PHY_1
net class P1_RXD: LAN8870_RX_CLK_PHY_1 LAN8870_RXCTL_PHY_1 LAN8870_RXD0_PHY_1 LAN8870_RXD1_PHY_1 LAN8870_RXD2_PHY_1 LAN8870_RXD3_PHY_1
net class P0_TXD: NetR38_1 NetR38_2 NetR40_1 NetR40_2 NetR55_1 NetR55_2 NetR56_1 NetR56_2 NetR57_1 NetR57_2 NetR58_1 NetR58_2
net class P0_RXD: LAN8830_CLK125_EN LAN8830_MODE0 LAN8830_MODE1 LAN8830_MODE2 LAN8830_MODE3 LAN8830_MODE4 NetR59_2 NetR60_2 NetR61_2 NetR62_2 NetR63_2 NetR64_2
differential pair class 100DIFF: LAN8830_TXRXA LAN8830_TXRXB LAN8830_TXRXC LAN8830_TXRXD P1_TRX P2_TRX P3_TRX P4_TRX TRX_PHY_1 TRX_PHY_2 TRX_PHY_3 TRX_PHY_4 TRX_TERM_PHY_1 TRX_TERM_PHY_2 TRX_TERM_PHY_3 TRX_TERM_PHY_4
channel class MCP1726_PINOUT: REG_1 REG_2 REG_3
channel class LAN8870_PINOUT: PHY_1 PHY_2 PHY_3 PHY_4
net class PWR: 1V2 3V3 8830_1V1 8870_1V1 LAN8870_VBAT_PHY_1 LAN8870_VBAT_PHY_2 LAN8870_VBAT_PHY_3 LAN8870_VBAT_PHY_4 LAN8870_VDDA_PHY_1 LAN8870_VDDA_PHY_2 LAN8870_VDDA_PHY_3 LAN8870_VDDA_PHY_4 LAN8870_VDDIO_PHY_1 LAN8870_VDDIO_PHY_2 LAN8870_VDDIO_PHY_3 LAN8870_VDDIO_PHY_4 LM61495Q3_VCC NetC70_PHY_1_1 NetC70_PHY_2_1 NetC70_PHY_3_1 NetC70_PHY_4_1 NetC72_PHY_1_1 NetC72_PHY_2_1 NetC72_PHY_3_1 NetC72_PHY_4_1 NetC76_PHY_1_1 NetC76_PHY_2_1 NetC76_PHY_3_1 NetC76_PHY_4_1 NetC80_PHY_1_1 NetC80_PHY_2_1 NetC80_PHY_3_1 NetC80_PHY_4_1 NetC102_1 NetC107_1 NetC109_1 NetC112_1 NetC120_2 NetF1_1 NetF1_2 P1_GND P2_GND P3_GND P4_GND RJ45_GND STM32_VDDA SW_VDD_CORE SW_VDDA_OSC SW_VDDA_PLL SW_VDDIO_CLO SW_VDDIO_HOST SW_VDDIO_MII0 SW_VDDIO_MII1 SW_VDDIO_MII2 SW_VDDIO_MII3 SW_VDDIO_MII4 VCC VDDIO_8830
component class SJA1150Q_PINOUT_0: C22 C23 C24 C25 C26 C27 C28 C29 C30 C31 C32 C33 C34 C35 C36 C37 C38 C39 C40 C41 C42 C43 C44 C45 C46 C47 C48 C49 C50 C51 C52 C53 C54 C55 C56 C57 C58 C59 C60 C61 C62 C63 FB1 FB2 FB3 FB4 FB5 FB6 FB7 FB8 FB9 FB10 J8 R4 R5 R6 R7 R8 R10 U1 Y1
component class SJA1105Q_LAN8870_EVB_revA: C1 C2 C3 C4 C5 C6 C7 C8 C9 C10 C11 C12 C13 C14 C15 C16 C17 C18 C19 C20 C21 D1 D2 D3 D4 D5 D6 D7 D10 F1 J1 J2 J3 J4 J5 J6 J7 J10 J11 J12 J13 J14 J15 J16 J17 J18 J19 MH1 MH2 MH3 MH4 MH5 MH6 MH7 MH8 Q1 R1 R2 R3 R38 R40 R50 R51 R55 R56 R57 R58 R59 R60 R61 R62 R63 R64 R65 R66 R67 R68 R69 R70 R71 R72 R73 R74 R75 R76
component class REG_2: C115_REG_2 C116_REG_2 C117_REG_2 C118_REG_2 C119_REG_2 R44_REG_2 R45_REG_2 R46_REG_2 U4_REG_2
component class REG_1: C115_REG_1 C116_REG_1 C117_REG_1 C118_REG_1 C119_REG_1 R44_REG_1 R45_REG_1 R46_REG_1 U4_REG_1
component class REG_0: C120 C121 C122 C123 C124 C125 C126 C127 C128 C129 C130 L2 R47 R48 U5
component class PHY_4: C64_PHY_4 C65_PHY_4 C66_PHY_4 C67_PHY_4 C68_PHY_4 C69_PHY_4 C70_PHY_4 C71_PHY_4 C72_PHY_4 C73_PHY_4 C74_PHY_4 C75_PHY_4 C76_PHY_4 C77_PHY_4 C78_PHY_4 C79_PHY_4 C80_PHY_4 C81_PHY_4 C82_PHY_4 C83_PHY_4 C84_PHY_4 C85_PHY_4 C86_PHY_4 C87_PHY_4 C88_PHY_4 C89_PHY_4 C90_PHY_4 C91_PHY_4 C92_PHY_4 D8_PHY_4 FB11_PHY_4 FB12_PHY_4 FB13_PHY_4 FB14_PHY_4 FB15_PHY_4 FB16_PHY_4 FB17_PHY_4 L1_PHY_4 R11_PHY_4 R12_PHY_4 R13_PHY_4 R14_PHY_4 R15_PHY_4 R16_PHY_4 R17_PHY_4 R18_PHY_4 R19_PHY_4 R20_PHY_4 R21_PHY_4 R22_PHY_4 R23_PHY_4 R24_PHY_4 R25_PHY_4 R26_PHY_4 R27_PHY_4 R28_PHY_4 R29_PHY_4 U2_PHY_4 Y2_PHY_4
component class PHY_3: C64_PHY_3 C65_PHY_3 C66_PHY_3 C67_PHY_3 C68_PHY_3 C69_PHY_3 C70_PHY_3 C71_PHY_3 C72_PHY_3 C73_PHY_3 C74_PHY_3 C75_PHY_3 C76_PHY_3 C77_PHY_3 C78_PHY_3 C79_PHY_3 C80_PHY_3 C81_PHY_3 C82_PHY_3 C83_PHY_3 C84_PHY_3 C85_PHY_3 C86_PHY_3 C87_PHY_3 C88_PHY_3 C89_PHY_3 C90_PHY_3 C91_PHY_3 C92_PHY_3 D8_PHY_3 FB11_PHY_3 FB12_PHY_3 FB13_PHY_3 FB14_PHY_3 FB15_PHY_3 FB16_PHY_3 FB17_PHY_3 L1_PHY_3 R11_PHY_3 R12_PHY_3 R13_PHY_3 R14_PHY_3 R15_PHY_3 R16_PHY_3 R17_PHY_3 R18_PHY_3 R19_PHY_3 R20_PHY_3 R21_PHY_3 R22_PHY_3 R23_PHY_3 R24_PHY_3 R25_PHY_3 R26_PHY_3 R27_PHY_3 R28_PHY_3 R29_PHY_3 U2_PHY_3 Y2_PHY_3
component class PHY_2: C64_PHY_2 C65_PHY_2 C66_PHY_2 C67_PHY_2 C68_PHY_2 C69_PHY_2 C70_PHY_2 C71_PHY_2 C72_PHY_2 C73_PHY_2 C74_PHY_2 C75_PHY_2 C76_PHY_2 C77_PHY_2 C78_PHY_2 C79_PHY_2 C80_PHY_2 C81_PHY_2 C82_PHY_2 C83_PHY_2 C84_PHY_2 C85_PHY_2 C86_PHY_2 C87_PHY_2 C88_PHY_2 C89_PHY_2 C90_PHY_2 C91_PHY_2 C92_PHY_2 D8_PHY_2 FB11_PHY_2 FB12_PHY_2 FB13_PHY_2 FB14_PHY_2 FB15_PHY_2 FB16_PHY_2 FB17_PHY_2 L1_PHY_2 R11_PHY_2 R12_PHY_2 R13_PHY_2 R14_PHY_2 R15_PHY_2 R16_PHY_2 R17_PHY_2 R18_PHY_2 R19_PHY_2 R20_PHY_2 R21_PHY_2 R22_PHY_2 R23_PHY_2 R24_PHY_2 R25_PHY_2 R26_PHY_2 R27_PHY_2 R28_PHY_2 R29_PHY_2 U2_PHY_2 Y2_PHY_2
component class PHY_1: C64_PHY_1 C65_PHY_1 C66_PHY_1 C67_PHY_1 C68_PHY_1 C69_PHY_1 C70_PHY_1 C71_PHY_1 C72_PHY_1 C73_PHY_1 C74_PHY_1 C75_PHY_1 C76_PHY_1 C77_PHY_1 C78_PHY_1 C79_PHY_1 C80_PHY_1 C81_PHY_1 C82_PHY_1 C83_PHY_1 C84_PHY_1 C85_PHY_1 C86_PHY_1 C87_PHY_1 C88_PHY_1 C89_PHY_1 C90_PHY_1 C91_PHY_1 C92_PHY_1 D8_PHY_1 FB11_PHY_1 FB12_PHY_1 FB13_PHY_1 FB14_PHY_1 FB15_PHY_1 FB16_PHY_1 FB17_PHY_1 L1_PHY_1 R11_PHY_1 R12_PHY_1 R13_PHY_1 R14_PHY_1 R15_PHY_1 R16_PHY_1 R17_PHY_1 R18_PHY_1 R19_PHY_1 R20_PHY_1 R21_PHY_1 R22_PHY_1 R23_PHY_1 R24_PHY_1 R25_PHY_1 R26_PHY_1 R27_PHY_1 R28_PHY_1 R29_PHY_1 U2_PHY_1 Y2_PHY_1
component class PHY_0: C93 C94 C95 C96 C97 C98 C99 C100 C101 C102 C103 C104 C105 C106 C107 C108 C109 C110 C111 C112 C113 C114 FB18 FB19 FB20 FB21 FB22 R30 R31 R32 R33 R34 R35 R36 R37 R39 R41 R42 R43 U3 Y3
component class MCU_0: C131 C132 C133 C134 C135 C136 C137 C138 C139 C140 C141 C142 C143 C144 C145 C146 FB23 J9 R52 R53 R54 SW1 U6 Y4 Y5
differential pair TRX_TERM_PHY_4: +TRX_TERM_PHY_4_P -TRX_TERM_PHY_4_N
differential pair TRX_TERM_PHY_3: +TRX_TERM_PHY_3_P -TRX_TERM_PHY_3_N
differential pair TRX_TERM_PHY_2: +TRX_TERM_PHY_2_P -TRX_TERM_PHY_2_N
differential pair TRX_TERM_PHY_1: +TRX_TERM_PHY_1_P -TRX_TERM_PHY_1_N
differential pair TRX_PHY_4: +TRX_PHY_4_P -TRX_PHY_4_N
differential pair TRX_PHY_3: +TRX_PHY_3_P -TRX_PHY_3_N
differential pair TRX_PHY_2: +TRX_PHY_2_P -TRX_PHY_2_N
differential pair TRX_PHY_1: +TRX_PHY_1_P -TRX_PHY_1_N
differential pair STM32_X32: +STM32_X32_P -STM32_X32_N
differential pair STM32_X25: +STM32_X25_P -STM32_X25_N
differential pair SJA1150Q_X25: +SJA1150Q_X25_P -SJA1150Q_X25_N
differential pair P4_TRX: +P4_TRX_P -P4_TRX_N
differential pair P3_TRX: +P3_TRX_P -P3_TRX_N
differential pair P2_TRX: +P2_TRX_P -P2_TRX_N
differential pair P1_TRX: +P1_TRX_P -P1_TRX_N
differential pair LAN8870_X25_PHY_4: +LAN8870_X25_PHY_4_P -LAN8870_X25_PHY_4_N
differential pair LAN8870_X25_PHY_3: +LAN8870_X25_PHY_3_P -LAN8870_X25_PHY_3_N
differential pair LAN8870_X25_PHY_2: +LAN8870_X25_PHY_2_P -LAN8870_X25_PHY_2_N
differential pair LAN8870_X25_PHY_1: +LAN8870_X25_PHY_1_P -LAN8870_X25_PHY_1_N
differential pair LAN8830_X25: +LAN8830_X25_P -LAN8830_X25_N
differential pair LAN8830_TXRXD: +LAN8830_TXRXD_P -LAN8830_TXRXD_N
differential pair LAN8830_TXRXC: +LAN8830_TXRXC_P -LAN8830_TXRXC_N
differential pair LAN8830_TXRXB: +LAN8830_TXRXB_P -LAN8830_TXRXB_N
differential pair LAN8830_TXRXA: +LAN8830_TXRXA_P -LAN8830_TXRXA_N

## Components (designator, comment, footprint, x,y, rotation, side; value= is the part's Value field where it differs from the comment)
C1 "100n" FP-0402-L_1_0_0_05-W_0_5-IPC_A 117,17.365 r0 bottom
C2 "JUMP" FP-0402-L_1_0_0_05-W_0_5-IPC_A 12,94 r180 top
C3 "JUMP" FP-0402-L_1_0_0_05-W_0_5-IPC_A 26,94 r0 top
C4 "JUMP" FP-0402-L_1_0_0_05-W_0_5-IPC_A 26,102 r0 top
C5 "JUMP" FP-0402-L_1_0_0_05-W_0_5-IPC_A 12,102 r180 top
C6 "JUMP" FP-0402-L_1_0_0_05-W_0_5-IPC_A 121,29 r90 top
C7 "JUMP" FP-0402-L_1_0_0_05-W_0_5-IPC_A 42,94 r180 top
C8 "JUMP" FP-0402-L_1_0_0_05-W_0_5-IPC_A 108,12 r180 top
C9 "JUMP" FP-0402-L_1_0_0_05-W_0_5-IPC_A 56,102 r0 top
C10 "JUMP" FP-0402-L_1_0_0_05-W_0_5-IPC_A 108,24 r180 top
C11 "JUMP" FP-0402-L_1_0_0_05-W_0_5-IPC_A 56,94 r0 top
C12 "JUMP" FP-0402-L_1_0_0_05-W_0_5-IPC_A 121,7 r270 top
C13 "JUMP" FP-0402-L_1_0_0_05-W_0_5-IPC_A 42,102 r180 top
C14 "JUMP" FP-0402-L_1_0_0_05-W_0_5-IPC_A 86,94 r0 top
C15 "JUMP" FP-0402-L_1_0_0_05-W_0_5-IPC_A 86,102 r0 top
C16 "JUMP" FP-0402-L_1_0_0_05-W_0_5-IPC_A 72,94 r180 top
C17 "JUMP" FP-0402-L_1_0_0_05-W_0_5-IPC_A 72,102 r180 top
C18 "JUMP" FP-0402-L_1_0_0_05-W_0_5-IPC_A 116,94 r0 top
C19 "JUMP" FP-0402-L_1_0_0_05-W_0_5-IPC_A 116,102 r0 top
C20 "JUMP" FP-0402-L_1_0_0_05-W_0_5-IPC_A 102,94 r180 top
C21 "JUMP" FP-0402-L_1_0_0_05-W_0_5-IPC_A 102,102 r180 top
C22 "30p" FP-0402-L_1_0_0_05-W_0_5-IPC_A 68.1,40.25 r0 top
C23 "30p" FP-0402-L_1_0_0_05-W_0_5-IPC_A 66.1,40.25 r180 top
C24 "1u" FP-0402-L_1_0_0_05-W_0_5-IPC_A 69.5,46.5 r270 bottom
C25 "100n" FP-0402-L_1_0_0_05-W_0_5-IPC_A 68,46.5 r270 bottom
C26 "1u" FP-0402-L_1_0_0_05-W_0_5-IPC_A 66,46 r0 bottom
C27 "100n" FP-0402-L_1_0_0_05-W_0_5-IPC_A 64,48 r90 bottom
C28 "1u" FP-0402-L_1_0_0_05-W_0_5-IPC_A 66.75,39.5 r0 bottom
C29 "100n" FP-0402-L_1_0_0_05-W_0_5-IPC_A 66.75,41 r0 bottom
C30 "100n" FP-0402-L_1_0_0_05-W_0_5-IPC_A 66.75,42.5 r0 bottom
C31 "1u" FP-0402-L_1_0_0_05-W_0_5-IPC_A 64.25,39.5 r180 bottom
C32 "100n" FP-0402-L_1_0_0_05-W_0_5-IPC_A 64.25,41 r180 bottom
C33 "100n" FP-0402-L_1_0_0_05-W_0_5-IPC_A 64.25,42.5 r180 bottom
C34 "1u" FP-0402-L_1_0_0_05-W_0_5-IPC_A 62,50.4 r0 bottom
C35 "1u" FP-0402-L_1_0_0_05-W_0_5-IPC_A 64,50.5 r180 bottom
C36 "100n" FP-0402-L_1_0_0_05-W_0_5-IPC_A 66,49 r180 bottom
C37 "100n" FP-0402-L_1_0_0_05-W_0_5-IPC_A 66,47.5 r0 bottom
C38 "100n" FP-0402-L_1_0_0_05-W_0_5-IPC_A 62,47.5 r180 bottom
C39 "100n" FP-0402-L_1_0_0_05-W_0_5-IPC_A 62,49 r0 bottom
C40 "100n" FP-0402-L_1_0_0_05-W_0_5-IPC_A 66,52 r180 bottom
C41 "100n" FP-0402-L_1_0_0_05-W_0_5-IPC_A 64,52 r180 bottom
C42 "100n" FP-0402-L_1_0_0_05-W_0_5-IPC_A 62.5,54.25 r90 bottom
C43 "100n" FP-0402-L_1_0_0_05-W_0_5-IPC_A 62,52 r0 bottom
C44 "1u" FP-0402-L_1_0_0_05-W_0_5-IPC_A 59.6,44.75 r270 bottom
C45 "100n" FP-0402-L_1_0_0_05-W_0_5-IPC_A 64,45.75 r270 bottom
C46 "100n" FP-0402-L_1_0_0_05-W_0_5-IPC_A 62.5,45.75 r270 bottom
C47 "100n" FP-0402-L_1_0_0_05-W_0_5-IPC_A 61,45.75 r270 bottom
C48 "1u" FP-0402-L_1_0_0_05-W_0_5-IPC_A 56.25,51 r90 bottom
C49 "100n" FP-0402-L_1_0_0_05-W_0_5-IPC_A 59.75,47.5 r180 bottom
C50 "100n" FP-0402-L_1_0_0_05-W_0_5-IPC_A 57.75,51 r90 bottom
C51 "100n" FP-0402-L_1_0_0_05-W_0_5-IPC_A 59.75,50.5 r180 bottom
C52 "1u" FP-0402-L_1_0_0_05-W_0_5-IPC_A 58,54.25 r90 bottom
C53 "100n" FP-0402-L_1_0_0_05-W_0_5-IPC_A 61,54.25 r90 bottom
C54 "100n" FP-0402-L_1_0_0_05-W_0_5-IPC_A 59.5,54.25 r90 bottom
C55 "100n" FP-0402-L_1_0_0_05-W_0_5-IPC_A 59.75,52 r180 bottom
C56 "1u" FP-0402-L_1_0_0_05-W_0_5-IPC_A 68.5,54.25 r90 bottom
C57 "100n" FP-0402-L_1_0_0_05-W_0_5-IPC_A 67,54.25 r90 bottom
C58 "100n" FP-0402-L_1_0_0_05-W_0_5-IPC_A 65.5,54.25 r90 bottom
C59 "100n" FP-0402-L_1_0_0_05-W_0_5-IPC_A 64,54.25 r90 bottom
C60 "1u" FP-0402-L_1_0_0_05-W_0_5-IPC_A 69.5,49.75 r270 bottom
C61 "100n" FP-0402-L_1_0_0_05-W_0_5-IPC_A 68.25,52 r0 bottom
C62 "100n" FP-0402-L_1_0_0_05-W_0_5-IPC_A 68,49.75 r270 bottom
C63 "100n" FP-0402-L_1_0_0_05-W_0_5-IPC_A 66,50.4 r180 bottom
C64_PHY_1 "100n" FP-0402-L_1_0_0_05-W_0_5-IPC_A 19.75,93 r90 bottom (schematic designator C64)
C64_PHY_2 "100n" FP-0402-L_1_0_0_05-W_0_5-IPC_A 49.75,93 r90 bottom (schematic designator C64)
C64_PHY_3 "100n" FP-0402-L_1_0_0_05-W_0_5-IPC_A 79.75,93 r90 bottom (schematic designator C64)
C64_PHY_4 "100n" FP-0402-L_1_0_0_05-W_0_5-IPC_A 109.75,93 r90 bottom (schematic designator C64)
C65_PHY_1 "100n" FP-0402-L_1_0_0_05-W_0_5-IPC_A 18.25,93 r90 bottom (schematic designator C65)
C65_PHY_2 "100n" FP-0402-L_1_0_0_05-W_0_5-IPC_A 48.25,93 r90 bottom (schematic designator C65)
C65_PHY_3 "100n" FP-0402-L_1_0_0_05-W_0_5-IPC_A 78.25,93 r90 bottom (schematic designator C65)
C65_PHY_4 "100n" FP-0402-L_1_0_0_05-W_0_5-IPC_A 108.25,93 r90 bottom (schematic designator C65)
C66_PHY_1 "4.7n" FP-0402-L_1_0_0_05-W_0_5-IPC_A 18,104 r270 bottom (schematic designator C66)
C66_PHY_2 "4.7n" FP-0402-L_1_0_0_05-W_0_5-IPC_A 48,104 r270 bottom (schematic designator C66)
C66_PHY_3 "4.7n" FP-0402-L_1_0_0_05-W_0_5-IPC_A 78,104 r270 bottom (schematic designator C66)
C66_PHY_4 "4.7n" FP-0402-L_1_0_0_05-W_0_5-IPC_A 108,104 r270 bottom (schematic designator C66)
C67_PHY_1 "1u" FP-0402-L_1_0_0_05-W_0_5-IPC_A 15,88 r90 bottom (schematic designator C67)
C67_PHY_2 "1u" FP-0402-L_1_0_0_05-W_0_5-IPC_A 45,88 r90 bottom (schematic designator C67)
C67_PHY_3 "1u" FP-0402-L_1_0_0_05-W_0_5-IPC_A 75,88 r90 bottom (schematic designator C67)
C67_PHY_4 "1u" FP-0402-L_1_0_0_05-W_0_5-IPC_A 105,88 r90 bottom (schematic designator C67)
C68_PHY_1 "30p" FP-0402-L_1_0_0_05-W_0_5-IPC_A 30.75,81 r90 bottom (schematic designator C68)
C68_PHY_2 "30p" FP-0402-L_1_0_0_05-W_0_5-IPC_A 60.75,81 r90 bottom (schematic designator C68)
C68_PHY_3 "30p" FP-0402-L_1_0_0_05-W_0_5-IPC_A 90.75,81 r90 bottom (schematic designator C68)
C68_PHY_4 "30p" FP-0402-L_1_0_0_05-W_0_5-IPC_A 120.75,81 r90 bottom (schematic designator C68)
C69_PHY_1 "30p" FP-0402-L_1_0_0_05-W_0_5-IPC_A 30.75,79 r270 bottom (schematic designator C69)
C69_PHY_2 "30p" FP-0402-L_1_0_0_05-W_0_5-IPC_A 60.75,79 r270 bottom (schematic designator C69)
C69_PHY_3 "30p" FP-0402-L_1_0_0_05-W_0_5-IPC_A 90.75,79 r270 bottom (schematic designator C69)
C69_PHY_4 "30p" FP-0402-L_1_0_0_05-W_0_5-IPC_A 120.75,79 r270 bottom (schematic designator C69)
C70_PHY_1 "4.7u" FP-0402-L_1_0_0_05-W_0_5-IPC_A 21.5,79 r180 top (schematic designator C70)
C70_PHY_2 "4.7u" FP-0402-L_1_0_0_05-W_0_5-IPC_A 51.5,79 r180 top (schematic designator C70)
C70_PHY_3 "4.7u" FP-0402-L_1_0_0_05-W_0_5-IPC_A 81.5,79 r180 top (schematic designator C70)
C70_PHY_4 "4.7u" FP-0402-L_1_0_0_05-W_0_5-IPC_A 111.5,79 r180 top (schematic designator C70)
C71_PHY_1 "100n" FP-0402-L_1_0_0_05-W_0_5-IPC_A 25.75,78.75 r0 bottom (schematic designator C71)
C71_PHY_2 "100n" FP-0402-L_1_0_0_05-W_0_5-IPC_A 55.75,78.75 r0 bottom (schematic designator C71)
C71_PHY_3 "100n" FP-0402-L_1_0_0_05-W_0_5-IPC_A 85.75,78.75 r0 bottom (schematic designator C71)
C71_PHY_4 "100n" FP-0402-L_1_0_0_05-W_0_5-IPC_A 115.75,78.75 r0 bottom (schematic designator C71)
C72_PHY_1 "1u" FP-0402-L_1_0_0_05-W_0_5-IPC_A 27,76 r0 top (schematic designator C72)
C72_PHY_2 "1u" FP-0402-L_1_0_0_05-W_0_5-IPC_A 57,76 r0 top (schematic designator C72)
C72_PHY_3 "1u" FP-0402-L_1_0_0_05-W_0_5-IPC_A 87,76 r0 top (schematic designator C72)
C72_PHY_4 "1u" FP-0402-L_1_0_0_05-W_0_5-IPC_A 117,76 r0 top (schematic designator C72)
C73_PHY_1 "100n" FP-0402-L_1_0_0_05-W_0_5-IPC_A 12.25,79.5 r180 bottom (schematic designator C73)
C73_PHY_2 "100n" FP-0402-L_1_0_0_05-W_0_5-IPC_A 42.25,79.5 r180 bottom (schematic designator C73)
C73_PHY_3 "100n" FP-0402-L_1_0_0_05-W_0_5-IPC_A 72.25,79.5 r180 bottom (schematic designator C73)
C73_PHY_4 "100n" FP-0402-L_1_0_0_05-W_0_5-IPC_A 102.25,79.5 r180 bottom (schematic designator C73)
C74_PHY_1 "100n" FP-0402-L_1_0_0_05-W_0_5-IPC_A 25.75,77.25 r0 bottom (schematic designator C74)
C74_PHY_2 "100n" FP-0402-L_1_0_0_05-W_0_5-IPC_A 55.75,77.25 r0 bottom (schematic designator C74)
C74_PHY_3 "100n" FP-0402-L_1_0_0_05-W_0_5-IPC_A 85.75,77.25 r0 bottom (schematic designator C74)
C74_PHY_4 "100n" FP-0402-L_1_0_0_05-W_0_5-IPC_A 115.75,77.25 r0 bottom (schematic designator C74)
C75_PHY_1 "100n" FP-0402-L_1_0_0_05-W_0_5-IPC_A 19,73.25 r270 bottom (schematic designator C75)
C75_PHY_2 "100n" FP-0402-L_1_0_0_05-W_0_5-IPC_A 49,73.25 r270 bottom (schematic designator C75)
C75_PHY_3 "100n" FP-0402-L_1_0_0_05-W_0_5-IPC_A 79,73.25 r270 bottom (schematic designator C75)
C75_PHY_4 "100n" FP-0402-L_1_0_0_05-W_0_5-IPC_A 109,73.25 r270 bottom (schematic designator C75)
C76_PHY_1 "1u" FP-0402-L_1_0_0_05-W_0_5-IPC_A 27,81.25 r0 top (schematic designator C76)
C76_PHY_2 "1u" FP-0402-L_1_0_0_05-W_0_5-IPC_A 57,81.25 r0 top (schematic designator C76)
C76_PHY_3 "1u" FP-0402-L_1_0_0_05-W_0_5-IPC_A 87,81.25 r0 top (schematic designator C76)
C76_PHY_4 "1u" FP-0402-L_1_0_0_05-W_0_5-IPC_A 117,81.25 r0 top (schematic designator C76)
C77_PHY_1 "100n" FP-0402-L_1_0_0_05-W_0_5-IPC_A 25.75,85.75 r0 bottom (schematic designator C77)
C77_PHY_2 "100n" FP-0402-L_1_0_0_05-W_0_5-IPC_A 55.75,85.75 r0 bottom (schematic designator C77)
C77_PHY_3 "100n" FP-0402-L_1_0_0_05-W_0_5-IPC_A 85.75,85.75 r0 bottom (schematic designator C77)
C77_PHY_4 "100n" FP-0402-L_1_0_0_05-W_0_5-IPC_A 115.75,85.75 r0 bottom (schematic designator C77)
C78_PHY_1 "100n" FP-0402-L_1_0_0_05-W_0_5-IPC_A 21.5,88 r90 bottom (schematic designator C78)
C78_PHY_2 "100n" FP-0402-L_1_0_0_05-W_0_5-IPC_A 51.5,88 r90 bottom (schematic designator C78)
C78_PHY_3 "100n" FP-0402-L_1_0_0_05-W_0_5-IPC_A 81.5,88 r90 bottom (schematic designator C78)
C78_PHY_4 "100n" FP-0402-L_1_0_0_05-W_0_5-IPC_A 111.5,88 r90 bottom (schematic designator C78)
C79_PHY_1 "100n" FP-0402-L_1_0_0_05-W_0_5-IPC_A 25.75,81 r0 bottom (schematic designator C79)
C79_PHY_2 "100n" FP-0402-L_1_0_0_05-W_0_5-IPC_A 55.75,81 r0 bottom (schematic designator C79)
C79_PHY_3 "100n" FP-0402-L_1_0_0_05-W_0_5-IPC_A 85.75,81 r0 bottom (schematic designator C79)
C79_PHY_4 "100n" FP-0402-L_1_0_0_05-W_0_5-IPC_A 115.75,81 r0 bottom (schematic designator C79)
C80_PHY_1 "100n" FP-0402-L_1_0_0_05-W_0_5-IPC_A 14.5,73.25 r270 bottom (schematic designator C80)
C80_PHY_2 "100n" FP-0402-L_1_0_0_05-W_0_5-IPC_A 46,70.5 r270 bottom (schematic designator C80)
C80_PHY_3 "100n" FP-0402-L_1_0_0_05-W_0_5-IPC_A 74.5,73.25 r270 bottom (schematic designator C80)
C80_PHY_4 "100n" FP-0402-L_1_0_0_05-W_0_5-IPC_A 104.5,73.25 r270 bottom (schematic designator C80)
C81_PHY_1 "4.7u" FP-0402-L_1_0_0_05-W_0_5-IPC_A 16,73.25 r270 bottom (schematic designator C81)
C81_PHY_2 "4.7u" FP-0402-L_1_0_0_05-W_0_5-IPC_A 46,73.25 r270 bottom (schematic designator C81)
C81_PHY_3 "4.7u" FP-0402-L_1_0_0_05-W_0_5-IPC_A 76,73.25 r270 bottom (schematic designator C81)
C81_PHY_4 "4.7u" FP-0402-L_1_0_0_05-W_0_5-IPC_A 106,73.25 r270 bottom (schematic designator C81)
C82_PHY_1 "4.7u" FP-0402-L_1_0_0_05-W_0_5-IPC_A 12.25,85.75 r180 bottom (schematic designator C82)
C82_PHY_2 "4.7u" FP-0402-L_1_0_0_05-W_0_5-IPC_A 42.25,85.75 r180 bottom (schematic designator C82)
C82_PHY_3 "4.7u" FP-0402-L_1_0_0_05-W_0_5-IPC_A 72.25,85.75 r180 bottom (schematic designator C82)
C82_PHY_4 "4.7u" FP-0402-L_1_0_0_05-W_0_5-IPC_A 102.25,85.75 r180 bottom (schematic designator C82)
C83_PHY_1 "100n" FP-0402-L_1_0_0_05-W_0_5-IPC_A 25.75,84.25 r0 bottom (schematic designator C83)
C83_PHY_2 "100n" FP-0402-L_1_0_0_05-W_0_5-IPC_A 55.75,84.25 r0 bottom (schematic designator C83)
C83_PHY_3 "100n" FP-0402-L_1_0_0_05-W_0_5-IPC_A 85.75,84.25 r0 bottom (schematic designator C83)
C83_PHY_4 "100n" FP-0402-L_1_0_0_05-W_0_5-IPC_A 115.75,84.25 r0 bottom (schematic designator C83)
C84_PHY_1 "100n" FP-0402-L_1_0_0_05-W_0_5-IPC_A 23,88 r90 bottom (schematic designator C84)
C84_PHY_2 "100n" FP-0402-L_1_0_0_05-W_0_5-IPC_A 53,88 r90 bottom (schematic designator C84)
C84_PHY_3 "100n" FP-0402-L_1_0_0_05-W_0_5-IPC_A 83,88 r90 bottom (schematic designator C84)
C84_PHY_4 "100n" FP-0402-L_1_0_0_05-W_0_5-IPC_A 113,88 r90 bottom (schematic designator C84)
C85_PHY_1 "100n" FP-0402-L_1_0_0_05-W_0_5-IPC_A 12.25,84.25 r180 bottom (schematic designator C85)
C85_PHY_2 "100n" FP-0402-L_1_0_0_05-W_0_5-IPC_A 42.25,84.25 r180 bottom (schematic designator C85)
C85_PHY_3 "100n" FP-0402-L_1_0_0_05-W_0_5-IPC_A 72.25,84.25 r180 bottom (schematic designator C85)
C85_PHY_4 "100n" FP-0402-L_1_0_0_05-W_0_5-IPC_A 102.25,84.25 r180 bottom (schematic designator C85)
C86_PHY_1 "100n" FP-0402-L_1_0_0_05-W_0_5-IPC_A 16.5,88 r90 bottom (schematic designator C86)
C86_PHY_2 "100n" FP-0402-L_1_0_0_05-W_0_5-IPC_A 46.5,88 r90 bottom (schematic designator C86)
C86_PHY_3 "100n" FP-0402-L_1_0_0_05-W_0_5-IPC_A 76.5,88 r90 bottom (schematic designator C86)
C86_PHY_4 "100n" FP-0402-L_1_0_0_05-W_0_5-IPC_A 106.5,88 r90 bottom (schematic designator C86)
C87_PHY_1 "4.7u" FP-0402-L_1_0_0_05-W_0_5-IPC_A 27,82.75 r0 top (schematic designator C87)
C87_PHY_2 "4.7u" FP-0402-L_1_0_0_05-W_0_5-IPC_A 57,82.75 r0 top (schematic designator C87)
C87_PHY_3 "4.7u" FP-0402-L_1_0_0_05-W_0_5-IPC_A 87,82.75 r0 top (schematic designator C87)
C87_PHY_4 "4.7u" FP-0402-L_1_0_0_05-W_0_5-IPC_A 117,82.75 r0 top (schematic designator C87)
C88_PHY_1 "100n" FP-0402-L_1_0_0_05-W_0_5-IPC_A 25.75,82.75 r0 bottom (schematic designator C88)
C88_PHY_2 "100n" FP-0402-L_1_0_0_05-W_0_5-IPC_A 55.75,82.75 r0 bottom (schematic designator C88)
C88_PHY_3 "100n" FP-0402-L_1_0_0_05-W_0_5-IPC_A 85.75,82.75 r0 bottom (schematic designator C88)
C88_PHY_4 "100n" FP-0402-L_1_0_0_05-W_0_5-IPC_A 115.75,82.75 r0 bottom (schematic designator C88)
C89_PHY_1 "4.7u" FP-0402-L_1_0_0_05-W_0_5-IPC_A 13.5,81.5 r0 top (schematic designator C89)
C89_PHY_2 "4.7u" FP-0402-L_1_0_0_05-W_0_5-IPC_A 43.5,81.5 r0 top (schematic designator C89)
C89_PHY_3 "4.7u" FP-0402-L_1_0_0_05-W_0_5-IPC_A 73.5,81.5 r0 top (schematic designator C89)
C89_PHY_4 "4.7u" FP-0402-L_1_0_0_05-W_0_5-IPC_A 103.5,81.5 r0 top (schematic designator C89)
C90_PHY_1 "100n" FP-0402-L_1_0_0_05-W_0_5-IPC_A 12.25,82.75 r180 bottom (schematic designator C90)
C90_PHY_2 "100n" FP-0402-L_1_0_0_05-W_0_5-IPC_A 42.25,82.75 r180 bottom (schematic designator C90)
C90_PHY_3 "100n" FP-0402-L_1_0_0_05-W_0_5-IPC_A 72.25,82.75 r180 bottom (schematic designator C90)
C90_PHY_4 "100n" FP-0402-L_1_0_0_05-W_0_5-IPC_A 102.25,82.75 r180 bottom (schematic designator C90)
C91_PHY_1 "100n" FP-0402-L_1_0_0_05-W_0_5-IPC_A 23,73.25 r270 bottom (schematic designator C91)
C91_PHY_2 "100n" FP-0402-L_1_0_0_05-W_0_5-IPC_A 53,73.25 r270 bottom (schematic designator C91)
C91_PHY_3 "100n" FP-0402-L_1_0_0_05-W_0_5-IPC_A 83,73.25 r270 bottom (schematic designator C91)
C91_PHY_4 "100n" FP-0402-L_1_0_0_05-W_0_5-IPC_A 113,73.25 r270 bottom (schematic designator C91)
C92_PHY_1 "100n" FP-0402-L_1_0_0_05-W_0_5-IPC_A 17.5,73.25 r270 bottom (schematic designator C92)
C92_PHY_2 "100n" FP-0402-L_1_0_0_05-W_0_5-IPC_A 47.5,73.25 r270 bottom (schematic designator C92)
C92_PHY_3 "100n" FP-0402-L_1_0_0_05-W_0_5-IPC_A 77.5,73.25 r270 bottom (schematic designator C92)
C92_PHY_4 "100n" FP-0402-L_1_0_0_05-W_0_5-IPC_A 107.5,73.25 r270 bottom (schematic designator C92)
C93 "1u" FP-0402-L_1_0_0_05-W_0_5-IPC_A 96.25,24.75 r90 bottom
C94 "30p" FP-0402-L_1_0_0_05-W_0_5-IPC_A 98.5,27.25 r0 bottom
C95 "30p" FP-0402-L_1_0_0_05-W_0_5-IPC_A 96.5,27.25 r180 bottom
C96 "1u" FP-0402-L_1_0_0_05-W_0_5-IPC_A 95,11.5 r270 top
C97 "100n" FP-0402-L_1_0_0_05-W_0_5-IPC_A 97,11.25 r270 bottom
C98 "100n" FP-0402-L_1_0_0_05-W_0_5-IPC_A 91.75,11.25 r270 bottom
C99 "100n" FP-0402-L_1_0_0_05-W_0_5-IPC_A 89.25,16.25 r180 bottom
C100 "100n" FP-0402-L_1_0_0_05-W_0_5-IPC_A 89.25,21.75 r180 bottom
C101 "100n" FP-0402-L_1_0_0_05-W_0_5-IPC_A 94.75,24.75 r90 bottom
C102 "10u" FP-0402-L_1_0_0_05-W_0_5-IPC_A 86,25 r180 top
C103 "100n" FP-0402-L_1_0_0_05-W_0_5-IPC_A 89.25,14.75 r180 bottom
C104 "100n" FP-0402-L_1_0_0_05-W_0_5-IPC_A 93.25,11.25 r270 bottom
C105 "100n" FP-0402-L_1_0_0_05-W_0_5-IPC_A 89.25,18.75 r180 bottom
C106 "100n" FP-0402-L_1_0_0_05-W_0_5-IPC_A 93.25,24.75 r90 bottom
C107 "1u" FP-0402-L_1_0_0_05-W_0_5-IPC_A 100.25,24.75 r90 bottom
C108 "100n" FP-0402-L_1_0_0_05-W_0_5-IPC_A 98.75,24.75 r90 bottom
C109 "10u" FP-0402-L_1_0_0_05-W_0_5-IPC_A 101,11.5 r270 top
C110 "100n" FP-0402-L_1_0_0_05-W_0_5-IPC_A 102.75,14.25 r0 bottom
C111 "100n" FP-0402-L_1_0_0_05-W_0_5-IPC_A 102.75,21.75 r0 bottom
C112 "1u" FP-0402-L_1_0_0_05-W_0_5-IPC_A 104.5,27 r90 top
C113 "100n" FP-0402-L_1_0_0_05-W_0_5-IPC_A 102.75,19.5 r0 bottom
C114 "100n" FP-0402-L_1_0_0_05-W_0_5-IPC_A 102.75,16.5 r0 bottom
C115_REG_1 "C0805C475J4RACAUTO" FP-C0805C475J4RACAUTO-MFG 63,34.5 r0 top (schematic designator C115)
C115_REG_2 "C0805C475J4RACAUTO" FP-C0805C475J4RACAUTO-MFG 80,31 r270 top (schematic designator C115)
C115_REG_3 "C0805C475J4RACAUTO" FP-C0805C475J4RACAUTO-MFG 29,54 r270 top (schematic designator C115)
C116_REG_1 "DNP" FP-C0805C475J4RACAUTO-MFG 60,31 r270 top (schematic designator C116)
C116_REG_2 "DNP" FP-C0805C475J4RACAUTO-MFG 78,31 r270 top (schematic designator C116)
C116_REG_3 "DNP" FP-C0805C475J4RACAUTO-MFG 27,54 r270 top (schematic designator C116)
C117_REG_1 "HMK325B7105KN-T" FP-1210-L_3_2_0_3-W_2_5_0-IPC_B 68.5,30 r270 top (schematic designator C117)
C117_REG_2 "HMK325B7105KN-T" FP-1210-L_3_2_0_3-W_2_5_0-IPC_B 88.5,30 r270 top (schematic designator C117)
C117_REG_3 "HMK325B7105KN-T" FP-1210-L_3_2_0_3-W_2_5_0-IPC_B 38,53 r270 top (schematic designator C117)
C118_REG_1 "DNP" FP-1210-L_3_2_0_3-W_2_5_0-IPC_B 72,30 r270 top (schematic designator C118)
C118_REG_2 "DNP" FP-1210-L_3_2_0_3-W_2_5_0-IPC_B 92,30 r270 top (schematic designator C118)
C118_REG_3 "DNP" FP-1210-L_3_2_0_3-W_2_5_0-IPC_B 41,53 r270 top (schematic designator C118)
C119_REG_1 "DNP" FP-0402-L_1_0_0_05-W_0_5-IPC_A 64,28 r180 top (schematic designator C119)
C119_REG_2 "DNP" FP-0402-L_1_0_0_05-W_0_5-IPC_A 84,28 r180 top (schematic designator C119)
C119_REG_3 "DNP" FP-0402-L_1_0_0_05-W_0_5-IPC_A 33,51 r180 top (schematic designator C119)
C120 "100n" FP-0402-L_1_0_0_05-W_0_5-IPC_A 21,43.5 r0 bottom
C121 "GRM32ER61C476KE15L" FP-GRM32E-0_3-0_2-IPC_C 43,38 r270 top
C122 "GRM32ER61C476KE15L" FP-GRM32E-0_3-0_2-IPC_C 43,44 r90 top
C123 "GRM32ER61C476KE15L" FP-GRM32E-0_3-0_2-IPC_C 46,44 r90 top
C124 "DNP" FP-GRM32E-0_3-0_2-IPC_C 46,38 r270 top
C125 "C3225X7R1H106M250AC" FP-C3225-250-0_4-MFG 18,36 r180 top
C126 "C3225X7R1H106M250AC" FP-C3225-250-0_4-MFG 18,46 r180 top
C127 "08055C474J4Z2A" FP-0805-L_2_01_0_2-W_1_25-IPC_B 23,46 r0 top
C128 "08055C474J4Z2A" FP-0805-L_2_01_0_2-W_1_25-IPC_B 23,36 r0 top
C129 "100n" FP-0402-L_1_0_0_05-W_0_5-IPC_A 18.5,41.5 r180 bottom
C130 "1u" FP-0402-L_1_0_0_05-W_0_5-IPC_A 16.25,43 r270 top
C131 "30p" FP-0402-L_1_0_0_05-W_0_5-IPC_A 97.75,50.5 r0 top
C132 "30p" FP-0402-L_1_0_0_05-W_0_5-IPC_A 95.75,50.5 r180 top
C133 "18p" FP-0402-L_1_0_0_05-W_0_5-IPC_A 102.25,50.5 r0 top
C134 "18p" FP-0402-L_1_0_0_05-W_0_5-IPC_A 100.25,50.5 r180 top
C135 "100n" FP-0402-L_1_0_0_05-W_0_5-IPC_A 111,52 r0 top
C136 "4.7u" FP-0402-L_1_0_0_05-W_0_5-IPC_A 94.75,44 r270 bottom
C137 "100n" FP-0402-L_1_0_0_05-W_0_5-IPC_A 93.25,44 r270 bottom
C138 "100n" FP-0402-L_1_0_0_05-W_0_5-IPC_A 93.25,36.75 r270 bottom
C139 "100n" FP-0402-L_1_0_0_05-W_0_5-IPC_A 100.75,37.75 r90 bottom
C140 "100n" FP-0402-L_1_0_0_05-W_0_5-IPC_A 100.75,44 r270 bottom
C141 "1u" FP-0402-L_1_0_0_05-W_0_5-IPC_A 94.75,39 r270 bottom
C142 "100n" FP-0402-L_1_0_0_05-W_0_5-IPC_A 93.25,39 r270 bottom
C143 "1u" FP-0402-L_1_0_0_05-W_0_5-IPC_A 97.75,44 r270 bottom
C144 "100n" FP-0402-L_1_0_0_05-W_0_5-IPC_A 99.25,44 r270 bottom
C145 "1u" FP-0402-L_1_0_0_05-W_0_5-IPC_A 94.75,41 r90 bottom
C146 "100n" FP-0402-L_1_0_0_05-W_0_5-IPC_A 93.25,41 r90 bottom
D1 "MMSZ5242BT1G" ONSC-SOD-123-2-425-04_V 19.5,50 r180 bottom
D2 "ESD204DQAR or PUSB3AB4Z" FP-DQA0010A-MFG 107.5,19.912 r180 bottom value=0.55pF
D3 "ESD204DQAR or PUSB3AB4Z" FP-DQA0010A-MFG 107.5,16.088 r180 bottom value=0.55pF
D4 "ESD204DQAR or PUSB3AB4Z" FP-DQA0010A-MFG 19,97 r90 bottom value=0.55pF
D5 "ESD204DQAR or PUSB3AB4Z" FP-DQA0010A-MFG 49,97 r90 bottom value=0.55pF
D6 "ESD204DQAR or PUSB3AB4Z" FP-DQA0010A-MFG 79,97 r90 bottom value=0.55pF
D7 "ESD204DQAR or PUSB3AB4Z" FP-DQA0010A-MFG 109,97 r90 bottom value=0.55pF
D8_PHY_1 "150066RG54050" WL-SBCD_0606 9,98 r270 top (schematic designator D8)
D8_PHY_2 "150066RG54050" WL-SBCD_0606 39,98 r270 top (schematic designator D8)
D8_PHY_3 "150066RG54050" WL-SBCD_0606 69,98 r270 top (schematic designator D8)
D8_PHY_4 "150066RG54050" WL-SBCD_0606 99,98 r270 top (schematic designator D8)
D10 "150066RG54050" WL-SBCD_0606 115,55 r90 top
F1 "2A" FP-SF-1206FP-MFG 16,54 r0 top
FB1 "BLM18KG331SH1D" FP-BLM18-0_15-t0_8-IPC_B 69.25,37 r90 bottom
FB2 "BLM18KG331SH1D" FP-BLM18-0_15-t0_8-IPC_B 66.25,44.25 r180 bottom
FB3 "BLM18KG331SH1D" FP-BLM18-0_15-t0_8-IPC_B 57,45.5 r0 bottom
FB4 "BLM18KG331SH1D" FP-BLM18-0_15-t0_8-IPC_B 66.75,37 r90 bottom
FB5 "BLM18KG331SH1D" FP-BLM18-0_15-t0_8-IPC_B 72,47 r180 bottom
FB6 "BLM18KG331SH1D" FP-BLM18-0_15-t0_8-IPC_B 57,48.5 r0 bottom
FB7 "BLM18KG331SH1D" FP-BLM18-0_15-t0_8-IPC_B 64.25,37 r90 bottom
FB8 "BLM18KG331SH1D" FP-BLM18-0_15-t0_8-IPC_B 56,54.25 r270 bottom
FB9 "BLM18KG331SH1D" FP-BLM18-0_15-t0_8-IPC_B 70.25,54.25 r270 bottom
FB10 "BLM18KG331SH1D" FP-BLM18-0_15-t0_8-IPC_B 72,50.5 r180 bottom
FB11_PHY_1 "BLM18KG331SH1D" FP-BLM18-0_15-t0_8-IPC_B 22.5,82 r270 top (schematic designator FB11)
FB11_PHY_2 "BLM18KG331SH1D" FP-BLM18-0_15-t0_8-IPC_B 52.5,82 r270 top (schematic designator FB11)
FB11_PHY_3 "BLM18KG331SH1D" FP-BLM18-0_15-t0_8-IPC_B 82.5,82 r270 top (schematic designator FB11)
FB11_PHY_4 "BLM18KG331SH1D" FP-BLM18-0_15-t0_8-IPC_B 112.5,82 r270 top (schematic designator FB11)
FB12_PHY_1 "BLM18KG331SH1D" FP-BLM18-0_15-t0_8-IPC_B 27,77.75 r180 top (schematic designator FB12)
FB12_PHY_2 "BLM18KG331SH1D" FP-BLM18-0_15-t0_8-IPC_B 57,77.75 r180 top (schematic designator FB12)
FB12_PHY_3 "BLM18KG331SH1D" FP-BLM18-0_15-t0_8-IPC_B 87,77.75 r180 top (schematic designator FB12)
FB12_PHY_4 "BLM18KG331SH1D" FP-BLM18-0_15-t0_8-IPC_B 117,77.75 r180 top (schematic designator FB12)
FB13_PHY_1 "BLM18KG331SH1D" FP-BLM18-0_15-t0_8-IPC_B 27,79.5 r180 top (schematic designator FB13)
FB13_PHY_2 "BLM18KG331SH1D" FP-BLM18-0_15-t0_8-IPC_B 57,79.5 r180 top (schematic designator FB13)
FB13_PHY_3 "BLM18KG331SH1D" FP-BLM18-0_15-t0_8-IPC_B 87,79.5 r180 top (schematic designator FB13)
FB13_PHY_4 "BLM18KG331SH1D" FP-BLM18-0_15-t0_8-IPC_B 117,79.5 r180 top (schematic designator FB13)
FB14_PHY_1 "BLM18KG331SH1D" FP-BLM18-0_15-t0_8-IPC_B 13,73 r270 bottom (schematic designator FB14)
FB14_PHY_2 "BLM18KG331SH1D" FP-BLM18-0_15-t0_8-IPC_B 44.5,70.5 r270 bottom (schematic designator FB14)
FB14_PHY_3 "BLM18KG331SH1D" FP-BLM18-0_15-t0_8-IPC_B 73,73 r270 bottom (schematic designator FB14)
FB14_PHY_4 "BLM18KG331SH1D" FP-BLM18-0_15-t0_8-IPC_B 103,73 r270 bottom (schematic designator FB14)
FB15_PHY_1 "BLM18KG331SH1D" FP-BLM18-0_15-t0_8-IPC_B 12,86 r0 top (schematic designator FB15)
FB15_PHY_2 "BLM18KG331SH1D" FP-BLM18-0_15-t0_8-IPC_B 42,86 r0 top (schematic designator FB15)
FB15_PHY_3 "BLM18KG331SH1D" FP-BLM18-0_15-t0_8-IPC_B 72,86 r0 top (schematic designator FB15)
FB15_PHY_4 "BLM18KG331SH1D" FP-BLM18-0_15-t0_8-IPC_B 102,86 r0 top (schematic designator FB15)
FB16_PHY_1 "BLM18KG331SH1D" FP-BLM18-0_15-t0_8-IPC_B 26.5,85 r270 top (schematic designator FB16)
FB16_PHY_2 "BLM18KG331SH1D" FP-BLM18-0_15-t0_8-IPC_B 56.5,85 r270 top (schematic designator FB16)
FB16_PHY_3 "BLM18KG331SH1D" FP-BLM18-0_15-t0_8-IPC_B 86.5,85 r270 top (schematic designator FB16)
FB16_PHY_4 "BLM18KG331SH1D" FP-BLM18-0_15-t0_8-IPC_B 116.5,85 r270 top (schematic designator FB16)
FB17_PHY_1 "BLM18KG331SH1D" FP-BLM18-0_15-t0_8-IPC_B 12,84 r0 top (schematic designator FB17)
FB17_PHY_2 "BLM18KG331SH1D" FP-BLM18-0_15-t0_8-IPC_B 42,84 r0 top (schematic designator FB17)
FB17_PHY_3 "BLM18KG331SH1D" FP-BLM18-0_15-t0_8-IPC_B 72,84 r0 top (schematic designator FB17)
FB17_PHY_4 "BLM18KG331SH1D" FP-BLM18-0_15-t0_8-IPC_B 102,84 r0 top (schematic designator FB17)
FB18 "BLM18KG331SH1D" FP-BLM18-0_15-t0_8-IPC_B 97,11.5 r90 top
FB19 "BLM18KG331SH1D" FP-BLM18-0_15-t0_8-IPC_B 94,26 r180 top
FB20 "BLM18KG331SH1D" FP-BLM18-0_15-t0_8-IPC_B 100.5,27 r270 top
FB21 "BLM18KG331SH1D" FP-BLM18-0_15-t0_8-IPC_B 99,11.5 r90 top
FB22 "BLM18KG331SH1D" FP-BLM18-0_15-t0_8-IPC_B 102.5,27 r270 top
FB23 "BLM18KG331SH1D" FP-BLM18-0_15-t0_8-IPC_B 97.25,40 r180 bottom
J1 "1-2834011-2" 1-2834011-2-Footprint-1 10.2,51.5 r270 top
J2 "PJ-102A" FP-PJ-102A-MFG 7,41 r90 top
J3 "RJMG201K21120FR" RJMG201K21120FR-Footprint-1 121,18 r90 top
J4 "E6S20A-40MT5-Z" E6S20A-40MT5-Z-Footprint-1 19,100 r0 top
J5 "E6S20A-40MT5-Z" E6S20A-40MT5-Z-Footprint-1 49,100 r0 top
J6 "E6S20A-40MT5-Z" E6S20A-40MT5-Z-Footprint-1 79,100 r0 top
J7 "E6S20A-40MT5-Z" E6S20A-40MT5-Z-Footprint-1 109,100 r0 top
J8 "3220-10-0300-00" 3220-10-0300-00-Footprint-1 79,41 r180 top
J9 "3220-10-0300-00" 3220-10-0300-00-Footprint-1 115,41 r180 top
J10 "5001" FP-5001-MFG 20,59.5 r0 top
J11 "5001" FP-5001-MFG 103,59 r0 top
J12 "5001" FP-5001-MFG 26.5,59.5 r0 top
J13 "5001" FP-5001-MFG 107,59 r0 top
J14 "5001" FP-5001-MFG 33,30 r0 top
J15 "5001" FP-5001-MFG 111,59 r0 top
J16 "5001" FP-5001-MFG 96,4 r0 top
J17 "5001" FP-5001-MFG 115,59 r0 top
J18 "5001" FP-5001-MFG 33,59.5 r0 top
J19 "5001" FP-5001-MFG 10,30 r0 top
L1_PHY_1 "ACT1210G-800-2P-TL10" FP-ACT1210G-800-2P-TL10-MFG 19,88 r90 bottom (schematic designator L1)
L1_PHY_2 "ACT1210G-800-2P-TL10" FP-ACT1210G-800-2P-TL10-MFG 49,88 r90 bottom (schematic designator L1)
L1_PHY_3 "ACT1210G-800-2P-TL10" FP-ACT1210G-800-2P-TL10-MFG 79,88 r90 bottom (schematic designator L1)
L1_PHY_4 "ACT1210G-800-2P-TL10" FP-ACT1210G-800-2P-TL10-MFG 109,88 r90 bottom (schematic designator L1)
L2 "74437377022" WE-LHMI_1335 33,41 r0 top
MH1 "PTHV6" "PTHV6 M2" 124,4 r0 top net-tie
MH2 "PTHV6" "PTHV6 M2" 4,30 r0 top net-tie
MH3 "PTHV6" "PTHV6 M2" 124,106 r0 top net-tie
MH4 "PTHV6" "PTHV6 M2" 64,4 r0 top net-tie
MH5 "PTHV6" "PTHV6 M2" 64,106 r0 top net-tie
MH6 "PTHV6" "PTHV6 M2" 94,106 r0 top net-tie
MH7 "PTHV6" "PTHV6 M2" 4,106 r0 top net-tie
MH8 "PTHV6" "PTHV6 M2" 34,106 r0 top net-tie
Q1 "SISH615ADN-T1-GE3" SISH615ADN-T1-GE3-Footprint-1 18,50 r90 top
R1 "100k" R0603B 18.5,52 r0 bottom
R2 "1k" R0603B 124.5,18.75 r0 bottom
R3 "1k" R0603B 124.5,17.25 r0 bottom
R4 "10k" R0603B 79,38 r180 bottom
R5 "10k" R0603B 79,39.5 r180 bottom
R6 "10k" R0603B 79,41 r180 bottom
R7 "10k" R0603B 79,42.5 r0 bottom
R8 "10k" R0603B 79,44 r180 bottom
R10 "100k" R0603B 88,42.25 r270 top
R11_PHY_1 "1k" R0603B 18,101.5 r270 bottom value=100k (schematic designator R11)
R11_PHY_2 "1k" R0603B 48,101.5 r270 bottom value=100k (schematic designator R11)
R11_PHY_3 "1k" R0603B 78,101.5 r270 bottom value=100k (schematic designator R11)
R11_PHY_4 "1k" R0603B 108,101.5 r270 bottom value=100k (schematic designator R11)
R12_PHY_1 "1k" R0603B 20,101.5 r270 bottom value=100k (schematic designator R12)
R12_PHY_2 "1k" R0603B 50,101.5 r270 bottom value=100k (schematic designator R12)
R12_PHY_3 "1k" R0603B 80,101.5 r270 bottom value=100k (schematic designator R12)
R12_PHY_4 "1k" R0603B 110,101.5 r270 bottom value=100k (schematic designator R12)
R13_PHY_1 "100k" R0603B 20,104 r90 bottom (schematic designator R13)
R13_PHY_2 "100k" R0603B 50,104 r90 bottom (schematic designator R13)
R13_PHY_3 "100k" R0603B 80,104 r90 bottom (schematic designator R13)
R13_PHY_4 "100k" R0603B 110,104 r90 bottom (schematic designator R13)
R14_PHY_1 "100k" R0603B 13.5,88 r270 bottom (schematic designator R14)
R14_PHY_2 "100k" R0603B 43.5,88 r270 bottom (schematic designator R14)
R14_PHY_3 "100k" R0603B 73.5,88 r270 bottom (schematic designator R14)
R14_PHY_4 "100k" R0603B 103.5,88 r270 bottom (schematic designator R14)
R15_PHY_1 "100k" R0603B 28.5,81.5 r0 bottom (schematic designator R15)
R15_PHY_2 "100k" R0603B 58.5,81.5 r0 bottom (schematic designator R15)
R15_PHY_3 "100k" R0603B 88.5,81.5 r0 bottom (schematic designator R15)
R15_PHY_4 "100k" R0603B 118.5,81.5 r0 bottom (schematic designator R15)
R16_PHY_1 "4.7k" R0603B 28.5,78.5 r0 bottom value=100k (schematic designator R16)
R16_PHY_2 "4.7k" R0603B 58.5,78.5 r0 bottom value=100k (schematic designator R16)
R16_PHY_3 "4.7k" R0603B 88.5,78.5 r0 bottom value=100k (schematic designator R16)
R16_PHY_4 "4.7k" R0603B 118.5,78.5 r0 bottom value=100k (schematic designator R16)
R17_PHY_1 "10k" R0603B 12.25,81.25 r180 bottom value=100k (schematic designator R17)
R17_PHY_2 "10k" R0603B 42.25,81.25 r180 bottom value=100k (schematic designator R17)
R17_PHY_3 "10k" R0603B 72.25,81.25 r180 bottom value=100k (schematic designator R17)
R17_PHY_4 "10k" R0603B 102.25,81.25 r180 bottom value=100k (schematic designator R17)
R18_PHY_1 "10k" R0603B 20,64 r90 bottom value=100k (schematic designator R18)
R18_PHY_2 "10k" R0603B 50.25,68 r90 bottom value=100k (schematic designator R18)
R18_PHY_3 "10k" R0603B 77.5,68 r270 bottom value=100k (schematic designator R18)
R18_PHY_4 "10k" R0603B 109,69.5 r270 top value=100k (schematic designator R18)
R19_PHY_1 "10k" R0603B 23.75,64 r270 bottom value=100k (schematic designator R19)
R19_PHY_2 "10k" R0603B 54.75,68 r270 bottom value=100k (schematic designator R19)
R19_PHY_3 "10k" R0603B 82.25,71.5 r0 bottom value=100k (schematic designator R19)
R19_PHY_4 "10k" R0603B 112.75,69.5 r90 top value=100k (schematic designator R19)
R20_PHY_1 "10k" R0603B 25.25,64 r270 bottom value=100k (schematic designator R20)
R20_PHY_2 "10k" R0603B 56.25,68 r270 bottom value=100k (schematic designator R20)
R20_PHY_3 "10k" R0603B 84.5,71.5 r180 bottom value=100k (schematic designator R20)
R20_PHY_4 "10k" R0603B 114,69.5 r90 top value=100k (schematic designator R20)
R21_PHY_1 "1k" R0603B 11.25,98.75 r0 bottom value=100k (schematic designator R21)
R21_PHY_2 "1k" R0603B 41.25,98.75 r0 bottom value=100k (schematic designator R21)
R21_PHY_3 "1k" R0603B 71.25,98.75 r0 bottom value=100k (schematic designator R21)
R21_PHY_4 "1k" R0603B 101.25,98.75 r0 bottom value=100k (schematic designator R21)
R22_PHY_1 "10k" R0603B 26.75,64 r270 bottom value=100k (schematic designator R22)
R22_PHY_2 "10k" R0603B 57.75,68 r270 bottom value=100k (schematic designator R22)
R22_PHY_3 "10k" R0603B 87,71.5 r0 bottom value=100k (schematic designator R22)
R22_PHY_4 "10k" R0603B 115.25,69.5 r90 top value=100k (schematic designator R22)
R23_PHY_1 "1k" R0603B 11.25,97.25 r0 bottom value=100k (schematic designator R23)
R23_PHY_2 "1k" R0603B 41.25,97.25 r0 bottom value=100k (schematic designator R23)
R23_PHY_3 "1k" R0603B 71.25,97.25 r0 bottom value=100k (schematic designator R23)
R23_PHY_4 "1k" R0603B 101.25,97.25 r0 bottom value=100k (schematic designator R23)
R24_PHY_1 "10k" R0603B 19,70.5 r270 bottom value=100k (schematic designator R24)
R24_PHY_2 "10k" R0603B 49,70.5 r270 bottom value=100k (schematic designator R24)